# EAGLE board SparkFun_Simblee_Breakout_Panel_v11 (EAGLE 7.5.0), part 1 of 6
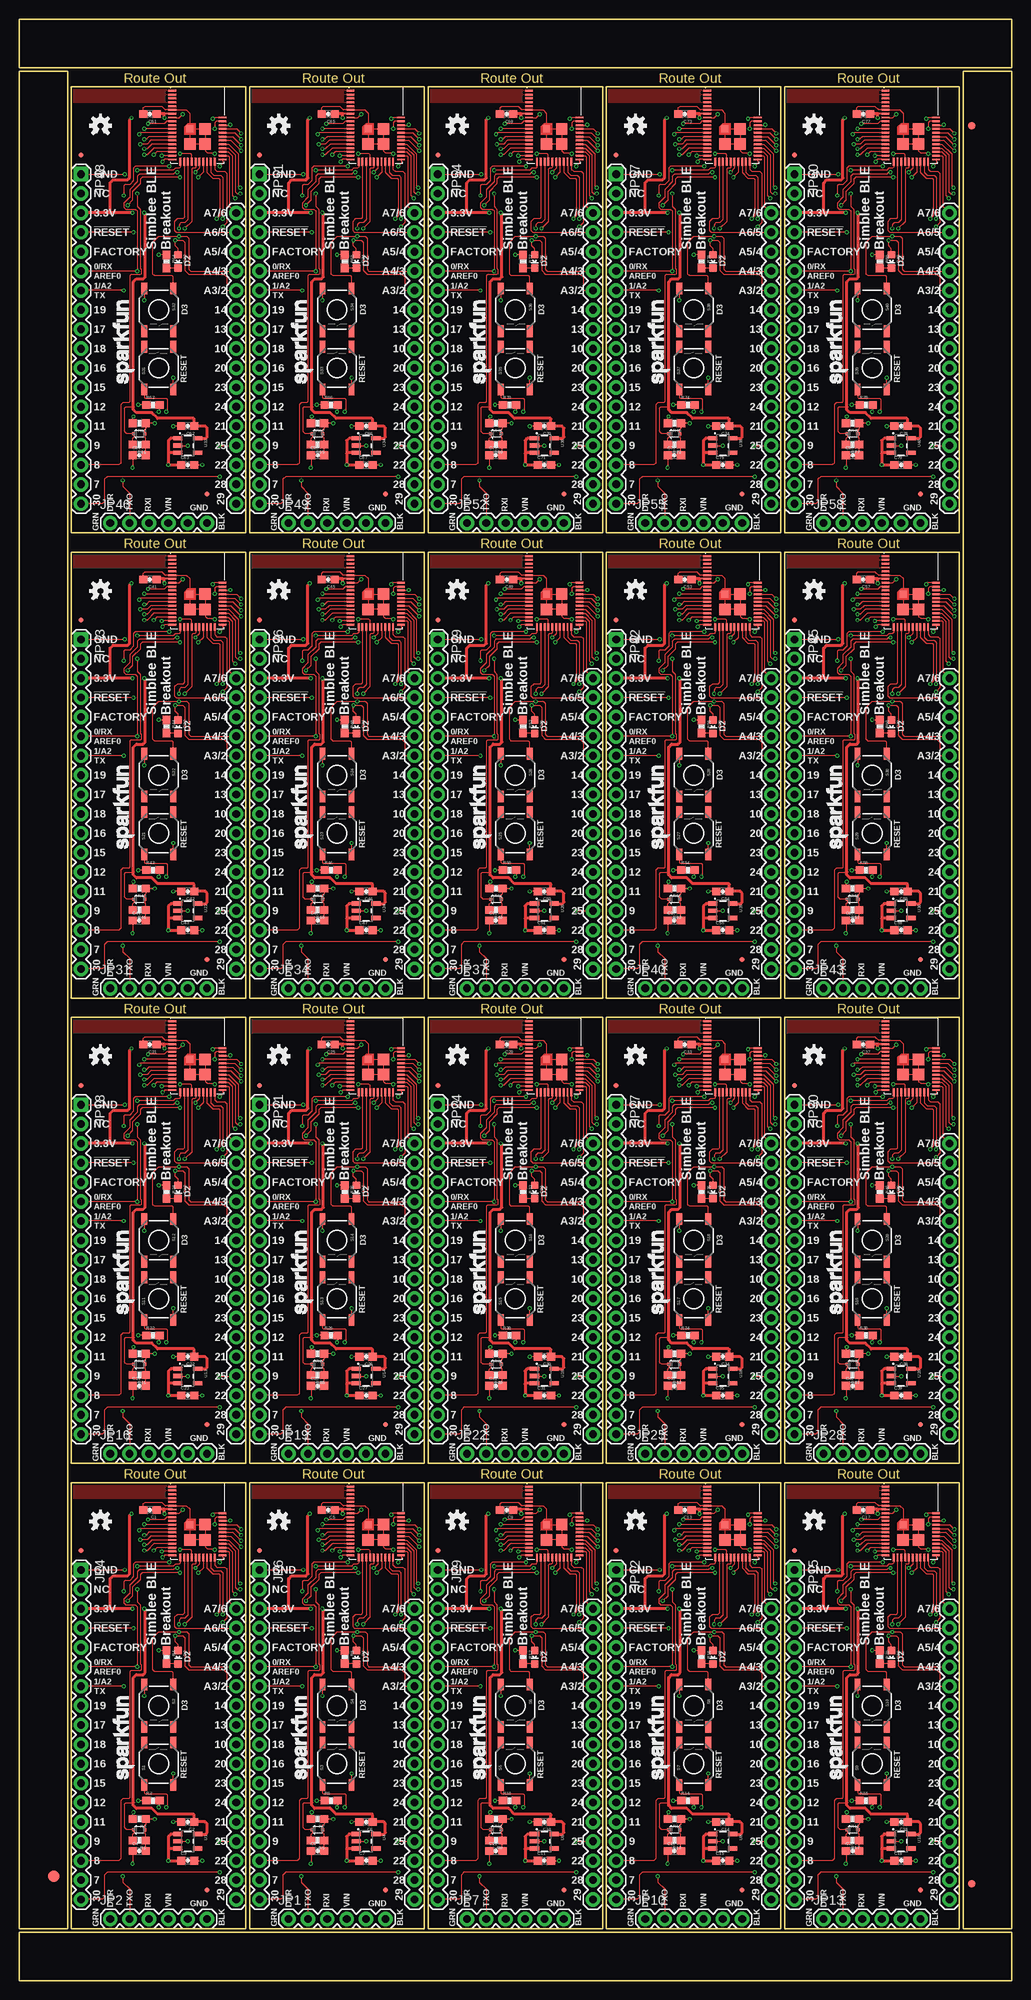
[diagram p0: board, top side]
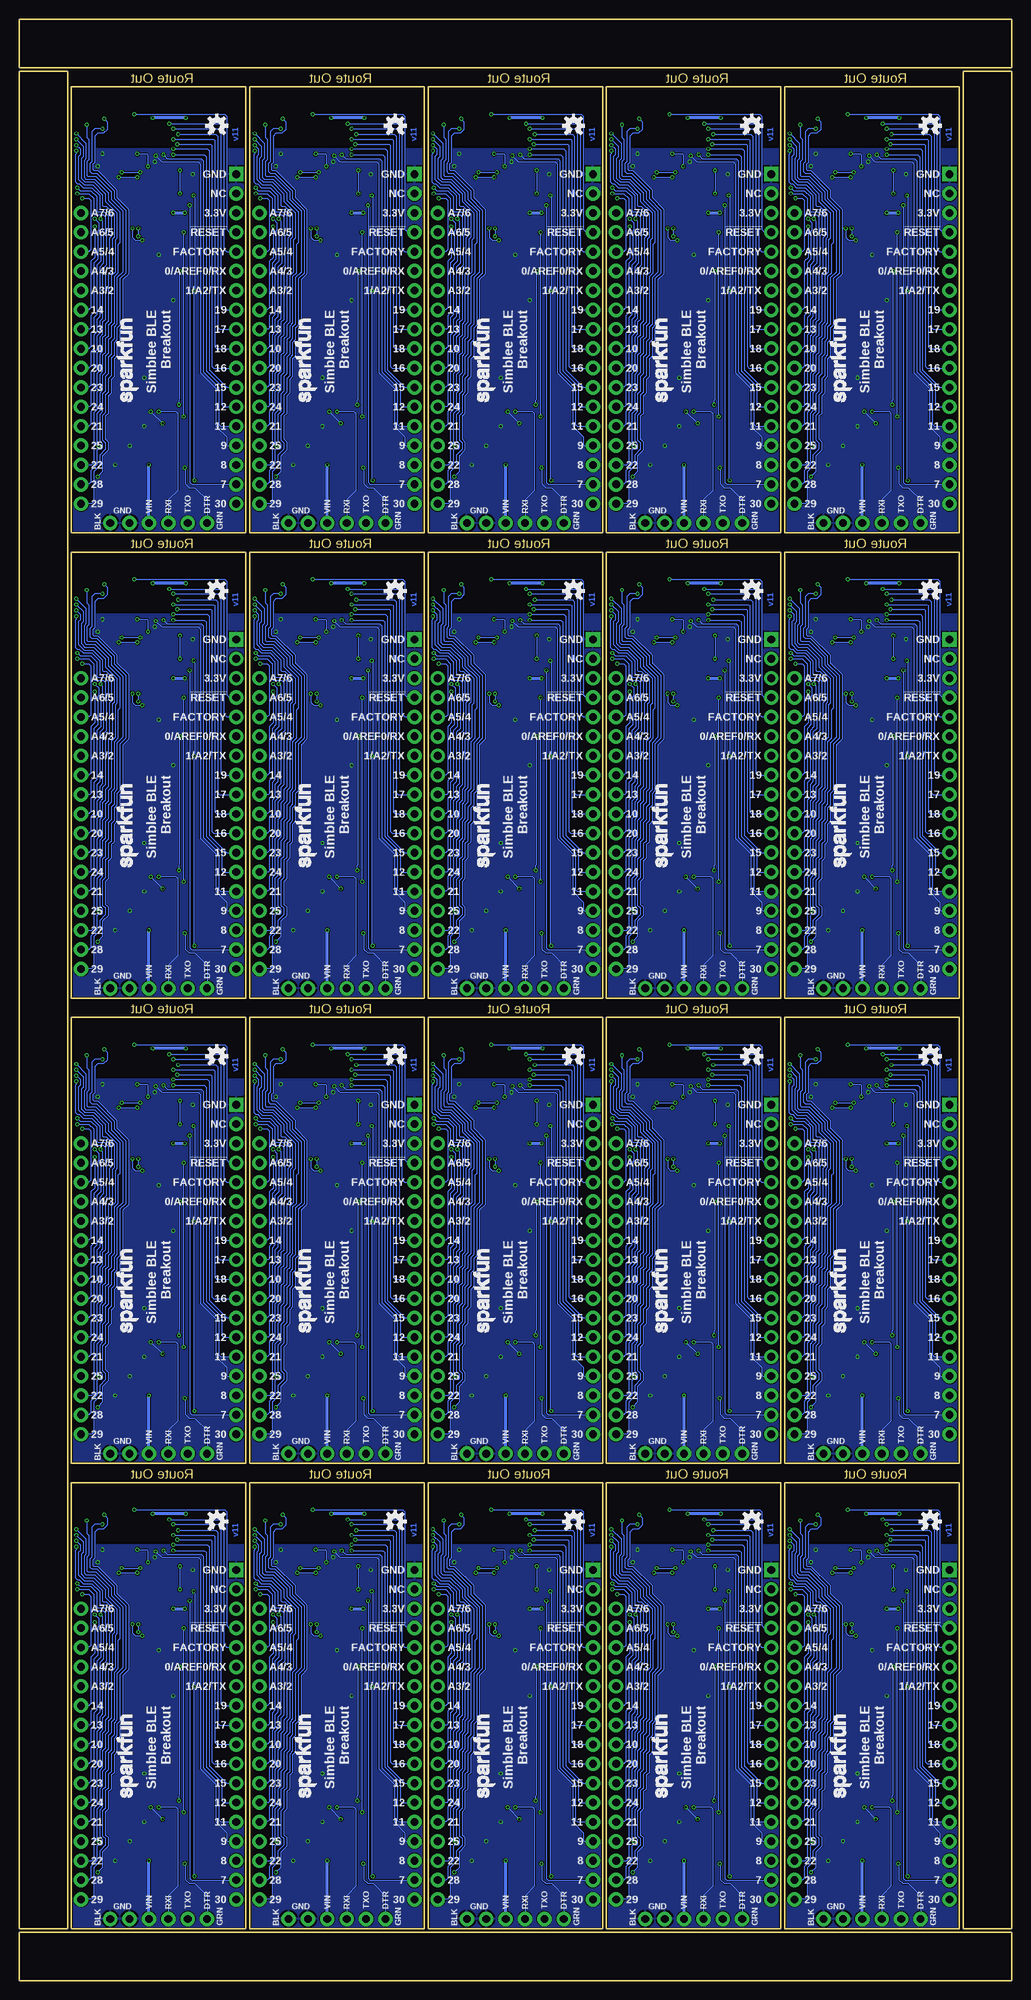
[diagram p1: board, bottom side, seen from below]

Size 130.05 x 257.05 mm. Coordinates in mm from the lower left corner, seen from the top.
Outline: 6.35,79.25 6.35,6.86 0,6.86 0,29.72
Outline: 0,27.18 0,250.19 6.35,250.19 6.35,76.71
Outline: 79.25,0 0,0 0,6.35 29.72,6.35
Outline: 27.18,6.35 130.05,6.35 130.05,0 76.71,0
Outline: 123.7,175.77 123.7,250.19 130.05,250.19 130.05,225.3
Outline: 130.05,227.84 130.05,6.86 123.7,6.86 123.7,178.31
Outline: 50.04,257.05 130.05,257.05 130.05,250.7 99.57,250.7
Outline: 102.11,250.7 0,250.7 0,257.05 52.58,257.05
Outline: 6.86,65.28 29.72,65.28 29.72,6.86 6.86,6.86 6.86,65.28
Outline: 30.23,65.28 53.09,65.28 53.09,6.86 30.23,6.86 30.23,65.28
Outline: 53.59,65.28 76.45,65.28 76.45,6.86 53.59,6.86 53.59,65.28
Outline: 76.96,65.28 99.82,65.28 99.82,6.86 76.96,6.86 76.96,65.28
Outline: 100.33,65.28 123.19,65.28 123.19,6.86 100.33,6.86 100.33,65.28
Outline: 6.86,126.24 29.72,126.24 29.72,67.82 6.86,67.82 6.86,126.24
Outline: 30.23,126.24 53.09,126.24 53.09,67.82 30.23,67.82 30.23,126.24
Outline: 53.59,126.24 76.45,126.24 76.45,67.82 53.59,67.82 53.59,126.24
Outline: 76.96,126.24 99.82,126.24 99.82,67.82 76.96,67.82 76.96,126.24
Outline: 100.33,126.24 123.19,126.24 123.19,67.82 100.33,67.82 100.33,126.24
Outline: 6.86,187.2 29.72,187.2 29.72,128.78 6.86,128.78 6.86,187.2
Outline: 30.23,187.2 53.09,187.2 53.09,128.78 30.23,128.78 30.23,187.2
Outline: 53.59,187.2 76.45,187.2 76.45,128.78 53.59,128.78 53.59,187.2
Outline: 76.96,187.2 99.82,187.2 99.82,128.78 76.96,128.78 76.96,187.2
Outline: 100.33,187.2 123.19,187.2 123.19,128.78 100.33,128.78 100.33,187.2
Outline: 6.86,248.16 29.72,248.16 29.72,189.74 6.86,189.74 6.86,248.16
Outline: 30.23,248.16 53.09,248.16 53.09,189.74 30.23,189.74 30.23,248.16
Outline: 53.59,248.16 76.45,248.16 76.45,189.74 53.59,189.74 53.59,248.16
Outline: 76.96,248.16 99.82,248.16 99.82,189.74 76.96,189.74 76.96,248.16
Outline: 100.33,248.16 123.19,248.16 123.19,189.74 100.33,189.74 100.33,248.16
Copper layers (1*16): Top 0.035mm / dielectric 1.5mm / Bottom 0.035mm
Design rules "SparkFun-2-layer-FAB-LIMIT": minimum track width 4mil, minimum drill 6mil, track to track 4mil, track to pad 4mil, pad to pad 4mil, via to via 4mil, smd to smd 4mil, copper to edge 4mil, drill to drill 4mil, minimum pad ring 5mil, minimum via ring 5mil, stop-mask expansion 4mil, vias tented up to drill 20mil, thermal gap 10mil
tRestrict: area 19.2,63.3 to 19.6,64.2; area 19.2,64.4 to 19.6,64.7; area 42.6,63.3 to 42.9,64.2; area 42.6,64.4 to 42.9,64.7; area 66,63.3 to 66.3,64.2; area 66,64.4 to 66.3,64.7; area 89.3,63.3 to 89.7,64.2; area 89.3,64.4 to 89.7,64.7; area 112.7,63.3 to 113,64.2; area 112.7,64.4 to 113,64.7; area 19.2,124.3 to 19.6,125.1; area 19.2,125.3 to 19.6,125.7; area 42.6,124.3 to 42.9,125.1; area 42.6,125.3 to 42.9,125.7; area 66,124.3 to 66.3,125.1; area 66,125.3 to 66.3,125.7; area 89.3,124.3 to 89.7,125.1; area 89.3,125.3 to 89.7,125.7; area 112.7,124.3 to 113,125.1; area 112.7,125.3 to 113,125.7; area 19.2,185.3 to 19.6,186.1; area 19.2,186.3 to 19.6,186.6; area 42.6,185.3 to 42.9,186.1; area 42.6,186.3 to 42.9,186.6; area 66,185.3 to 66.3,186.1; area 66,186.3 to 66.3,186.6; area 89.3,185.3 to 89.7,186.1; area 89.3,186.3 to 89.7,186.6; area 112.7,185.3 to 113,186.1; area 112.7,186.3 to 113,186.6; area 19.2,246.2 to 19.6,247.1; area 19.2,247.2 to 19.6,247.6; area 42.6,246.2 to 42.9,247.1; area 42.6,247.2 to 42.9,247.6; area 66,246.2 to 66.3,247.1; area 66,247.2 to 66.3,247.6; area 89.3,246.2 to 89.7,247.1; area 89.3,247.2 to 89.7,247.6; area 112.7,246.2 to 113,247.1; area 112.7,247.2 to 113,247.6

## Footprints (pad centres in the part's own frame; a part is rotated, then mirrored left to right if it is on the bottom)
0603-CAP = smd 1.1 x 1: 1 -0.85,0; 2 0.85,0
SOD-523 = smd 0.4 x 0.4: A -0.7,0; C 0.7,0
LED-0603 = smd 1 x 1: A 0,-0.877; C 0,0.877
FIDUCIAL-1.5X3 = smd 1.5 x 1.5: 1 0,0
FIDUCIAL-1X2 = smd 1 x 1: 1 0,0
MICRO-FIDUCIAL = smd 0.635 x 0.635: 1 0,0
1X06 = drill 1.016 pad 1.88: 1 0,0; 2 2.54,0; 3 5.08,0; 4 7.62,0; 5 10.16,0; 6 12.7,0
1X16 = drill 1.016 pad 1.88: 1 0,0; 2 2.54,0; 3 5.08,0; 4 7.62,0; 5 10.16,0; 6 12.7,0; 7 15.24,0; 8 17.78,0; 9 20.32,0; 10 22.86,0; 11 25.4,0; 12 27.94,0; 13 30.48,0; 14 33.02,0; 15 35.56,0; 16 38.1,0
1X18 = drill 1.016 pad 1.88 square: 1 0,0 | drill 1.016 pad 1.88: 2 2.54,0; 3 5.08,0; 4 7.62,0; 5 10.16,0; 6 12.7,0; 7 15.24,0; 8 17.78,0; 9 20.32,0; 10 22.86,0; 11 25.4,0; 12 27.94,0; 13 30.48,0; 14 33.02,0; 15 35.56,0; 16 38.1,0; 17 40.64,0; 18 43.18,0
0603-RES = smd 1.1 x 1: 1 -0.85,0; 2 0.85,0
TACTILE-SWITCH-SMD = smd 1.524 x 0.762: 1 -2.794,1.905; 2 2.794,1.905; 3 -2.794,-1.905; 4 2.794,-1.905
SOT23-5 = smd 0.55 x 1.2: 1 -0.95,-1.3; 2 0,-1.3; 3 0.95,-1.3; 4 0.95,1.3; 5 -0.95,1.3
RFD77101 = smd 1 x 0.254: 1 0,0; 2 0,-0.5; 3 0,-1; 4 0,-1.5; 5 0,-2; 6 0,-2.5; 7 0,-3; 8 0,-3.5; 9 0,-4; 10 0,-4.5; 11 0,-5; 12 0,-5.5; 13 0,-6; 14 0,-6.5; 15 0,-7; 16 0,-7.5; 17 0,-8; 18 0,-8.5; 19 0,-9; 30 6.61,-9; 31 6.61,-8.5; 32 6.61,-8; 33 6.61,-7.5; 34 6.61,-7; 35 6.61,-6.5; 36 6.61,-6; 37 6.61,-5.5; 38 6.61,-5; 39 6.61,-4.5; 40 6.61,-4; 41 6.61,-3.5 | smd 0.254 x 1: 20 1.055,-9.29; 21 1.555,-9.29; 22 2.055,-9.29; 23 2.555,-9.29; 24 3.055,-9.29; 25 3.555,-9.29; 26 4.055,-9.29; 27 4.555,-9.29; 28 5.055,-9.29; 29 5.555,-9.29 | smd 0.9 x 0.9: 42 2.3,-4.99 | smd 1.5 x 1.5: 43 2.3,-6.99; 44 4.3,-6.99; 45 4.3,-4.99

## Placement (x,y rotation side)
C1  0.1uF  [0603-CAP]  17.14,61.72 180 top
C2  1.0uF  [0603-CAP]  22.1,20.83 180 top
C3  1.0uF  [0603-CAP]  22.1,15.75 0 top
C4  10nF  [0603-CAP]  15.75,17.02 0 top
C5  0.1uF  [0603-CAP]  40.51,61.72 180 top
C6  1.0uF  [0603-CAP]  45.47,20.83 180 top
C7  1.0uF  [0603-CAP]  45.47,15.75 0 top
C8  10nF  [0603-CAP]  39.12,17.02 0 top
C9  0.1uF  [0603-CAP]  63.88,61.72 180 top
C10  1.0uF  [0603-CAP]  68.83,20.83 180 top
C11  1.0uF  [0603-CAP]  68.83,15.75 0 top
C12  10nF  [0603-CAP]  62.48,17.02 0 top
C13  0.1uF  [0603-CAP]  87.25,61.72 180 top
C14  1.0uF  [0603-CAP]  92.2,20.83 180 top
C15  1.0uF  [0603-CAP]  92.2,15.75 0 top
C16  10nF  [0603-CAP]  85.85,17.02 0 top
C17  0.1uF  [0603-CAP]  110.62,61.72 180 top
C18  1.0uF  [0603-CAP]  115.57,20.83 180 top
C19  1.0uF  [0603-CAP]  115.57,15.75 0 top
C20  10nF  [0603-CAP]  109.22,17.02 0 top
C21  0.1uF  [0603-CAP]  17.14,122.68 180 top
C22  1.0uF  [0603-CAP]  22.1,81.79 180 top
C23  1.0uF  [0603-CAP]  22.1,76.71 0 top
C24  10nF  [0603-CAP]  15.75,77.98 0 top
C25  0.1uF  [0603-CAP]  40.51,122.68 180 top
C26  1.0uF  [0603-CAP]  45.47,81.79 180 top
C27  1.0uF  [0603-CAP]  45.47,76.71 0 top
C28  10nF  [0603-CAP]  39.12,77.98 0 top
C29  0.1uF  [0603-CAP]  63.88,122.68 180 top
C30  1.0uF  [0603-CAP]  68.83,81.79 180 top
C31  1.0uF  [0603-CAP]  68.83,76.71 0 top
C32  10nF  [0603-CAP]  62.48,77.98 0 top
C33  0.1uF  [0603-CAP]  87.25,122.68 180 top
C34  1.0uF  [0603-CAP]  92.2,81.79 180 top
C35  1.0uF  [0603-CAP]  92.2,76.71 0 top
C36  10nF  [0603-CAP]  85.85,77.98 0 top
C37  0.1uF  [0603-CAP]  110.62,122.68 180 top
C38  1.0uF  [0603-CAP]  115.57,81.79 180 top
C39  1.0uF  [0603-CAP]  115.57,76.71 0 top
C40  10nF  [0603-CAP]  109.22,77.98 0 top
C41  0.1uF  [0603-CAP]  17.14,183.64 180 top
C42  1.0uF  [0603-CAP]  22.1,142.75 180 top
C43  1.0uF  [0603-CAP]  22.1,137.67 0 top
C44  10nF  [0603-CAP]  15.75,138.94 0 top
C45  0.1uF  [0603-CAP]  40.51,183.64 180 top
C46  1.0uF  [0603-CAP]  45.47,142.75 180 top
C47  1.0uF  [0603-CAP]  45.47,137.67 0 top
C48  10nF  [0603-CAP]  39.12,138.94 0 top
C49  0.1uF  [0603-CAP]  63.88,183.64 180 top
C50  1.0uF  [0603-CAP]  68.83,142.75 180 top
C51  1.0uF  [0603-CAP]  68.83,137.67 0 top
C52  10nF  [0603-CAP]  62.48,138.94 0 top
C53  0.1uF  [0603-CAP]  87.25,183.64 180 top
C54  1.0uF  [0603-CAP]  92.2,142.75 180 top
C55  1.0uF  [0603-CAP]  92.2,137.67 0 top
C56  10nF  [0603-CAP]  85.85,138.94 0 top
C57  0.1uF  [0603-CAP]  110.62,183.64 180 top
C58  1.0uF  [0603-CAP]  115.57,142.75 180 top
C59  1.0uF  [0603-CAP]  115.57,137.67 0 top
C60  10nF  [0603-CAP]  109.22,138.94 0 top
C61  0.1uF  [0603-CAP]  17.14,244.6 180 top
C62  1.0uF  [0603-CAP]  22.1,203.71 180 top
C63  1.0uF  [0603-CAP]  22.1,198.63 0 top
C64  10nF  [0603-CAP]  15.75,199.9 0 top
C65  0.1uF  [0603-CAP]  40.51,244.6 180 top
C66  1.0uF  [0603-CAP]  45.47,203.71 180 top
C67  1.0uF  [0603-CAP]  45.47,198.63 0 top
C68  10nF  [0603-CAP]  39.12,199.9 0 top
C69  0.1uF  [0603-CAP]  63.88,244.6 180 top
C70  1.0uF  [0603-CAP]  68.83,203.71 180 top
C71  1.0uF  [0603-CAP]  68.83,198.63 0 top
C72  10nF  [0603-CAP]  62.48,199.9 0 top
C73  0.1uF  [0603-CAP]  87.25,244.6 180 top
C74  1.0uF  [0603-CAP]  92.2,203.71 180 top
C75  1.0uF  [0603-CAP]  92.2,198.63 0 top
C76  10nF  [0603-CAP]  85.85,199.9 0 top
C77  0.1uF  [0603-CAP]  110.62,244.6 180 top
C78  1.0uF  [0603-CAP]  115.57,203.71 180 top
C79  1.0uF  [0603-CAP]  115.57,198.63 0 top
C80  10nF  [0603-CAP]  109.22,199.9 0 top
D1  RB751  [SOD-523]  15.75,19.81 180 top
D2  RED  [LED-0603]  20.83,42.42 180 top
D3  RB751  [SOD-523]  39.12,19.81 180 top
D4  RED  [LED-0603]  44.2,42.42 180 top
D5  RB751  [SOD-523]  62.48,19.81 180 top
D6  RED  [LED-0603]  67.56,42.42 180 top
D7  RB751  [SOD-523]  85.85,19.81 180 top
D8  RED  [LED-0603]  90.93,42.42 180 top
D9  RB751  [SOD-523]  109.22,19.81 180 top
D10  RED  [LED-0603]  114.3,42.42 180 top
D11  RB751  [SOD-523]  15.75,80.77 180 top
D12  RED  [LED-0603]  20.83,103.38 180 top
D13  RB751  [SOD-523]  39.12,80.77 180 top
D14  RED  [LED-0603]  44.2,103.38 180 top
D15  RB751  [SOD-523]  62.48,80.77 180 top
D16  RED  [LED-0603]  67.56,103.38 180 top
D17  RB751  [SOD-523]  85.85,80.77 180 top
D18  RED  [LED-0603]  90.93,103.38 180 top
D19  RB751  [SOD-523]  109.22,80.77 180 top
D20  RED  [LED-0603]  114.3,103.38 180 top
D21  RB751  [SOD-523]  15.75,141.73 180 top
D22  RED  [LED-0603]  20.83,164.34 180 top
D23  RB751  [SOD-523]  39.12,141.73 180 top
D24  RED  [LED-0603]  44.2,164.34 180 top
D25  RB751  [SOD-523]  62.48,141.73 180 top
D26  RED  [LED-0603]  67.56,164.34 180 top
D27  RB751  [SOD-523]  85.85,141.73 180 top
D28  RED  [LED-0603]  90.93,164.34 180 top
D29  RB751  [SOD-523]  109.22,141.73 180 top
D30  RED  [LED-0603]  114.3,164.34 180 top
D31  RB751  [SOD-523]  15.75,202.69 180 top
D32  RED  [LED-0603]  20.83,225.3 180 top
D33  RB751  [SOD-523]  39.12,202.69 180 top
D34  RED  [LED-0603]  44.2,225.3 180 top
D35  RB751  [SOD-523]  62.48,202.69 180 top
D36  RED  [LED-0603]  67.56,225.3 180 top
D37  RB751  [SOD-523]  85.85,202.69 180 top
D38  RED  [LED-0603]  90.93,225.3 180 top
D39  RB751  [SOD-523]  109.22,202.69 180 top
D40  RED  [LED-0603]  114.3,225.3 180 top
E$1  [FIDUCIAL-1.5X3]  4.57,13.72 0 top
E$5  [FIDUCIAL-1X2]  124.84,243.08 180 top
E$6  [FIDUCIAL-1X2]  124.84,12.7 0 top
FID1  FIDUCIALUFIDUCIAL  [MICRO-FIDUCIAL]  24.64,11.94 0 top
FID2  FIDUCIALUFIDUCIAL  [MICRO-FIDUCIAL]  8.13,56.39 0 top
FID3  FIDUCIALUFIDUCIAL  [MICRO-FIDUCIAL]  48.01,11.94 0 top
FID4  FIDUCIALUFIDUCIAL  [MICRO-FIDUCIAL]  31.5,56.39 0 top
FID5  FIDUCIALUFIDUCIAL  [MICRO-FIDUCIAL]  71.37,11.94 0 top
FID6  FIDUCIALUFIDUCIAL  [MICRO-FIDUCIAL]  54.86,56.39 0 top
FID7  FIDUCIALUFIDUCIAL  [MICRO-FIDUCIAL]  94.74,11.94 0 top
FID8  FIDUCIALUFIDUCIAL  [MICRO-FIDUCIAL]  78.23,56.39 0 top
FID9  FIDUCIALUFIDUCIAL  [MICRO-FIDUCIAL]  118.11,11.94 0 top
FID10  FIDUCIALUFIDUCIAL  [MICRO-FIDUCIAL]  101.6,56.39 0 top
FID11  FIDUCIALUFIDUCIAL  [MICRO-FIDUCIAL]  24.64,72.9 0 top
FID12  FIDUCIALUFIDUCIAL  [MICRO-FIDUCIAL]  8.13,117.35 0 top
FID13  FIDUCIALUFIDUCIAL  [MICRO-FIDUCIAL]  48.01,72.9 0 top
FID14  FIDUCIALUFIDUCIAL  [MICRO-FIDUCIAL]  31.5,117.35 0 top
FID15  FIDUCIALUFIDUCIAL  [MICRO-FIDUCIAL]  71.37,72.9 0 top
FID16  FIDUCIALUFIDUCIAL  [MICRO-FIDUCIAL]  54.86,117.35 0 top
FID17  FIDUCIALUFIDUCIAL  [MICRO-FIDUCIAL]  94.74,72.9 0 top
FID18  FIDUCIALUFIDUCIAL  [MICRO-FIDUCIAL]  78.23,117.35 0 top
FID19  FIDUCIALUFIDUCIAL  [MICRO-FIDUCIAL]  118.11,72.9 0 top
FID20  FIDUCIALUFIDUCIAL  [MICRO-FIDUCIAL]  101.6,117.35 0 top
FID21  FIDUCIALUFIDUCIAL  [MICRO-FIDUCIAL]  24.64,133.86 0 top
FID22  FIDUCIALUFIDUCIAL  [MICRO-FIDUCIAL]  8.13,178.31 0 top
FID23  FIDUCIALUFIDUCIAL  [MICRO-FIDUCIAL]  48.01,133.86 0 top
FID24  FIDUCIALUFIDUCIAL  [MICRO-FIDUCIAL]  31.5,178.31 0 top
FID25  FIDUCIALUFIDUCIAL  [MICRO-FIDUCIAL]  71.37,133.86 0 top
FID26  FIDUCIALUFIDUCIAL  [MICRO-FIDUCIAL]  54.86,178.31 0 top
FID27  FIDUCIALUFIDUCIAL  [MICRO-FIDUCIAL]  94.74,133.86 0 top
FID28  FIDUCIALUFIDUCIAL  [MICRO-FIDUCIAL]  78.23,178.31 0 top
FID29  FIDUCIALUFIDUCIAL  [MICRO-FIDUCIAL]  118.11,133.86 0 top
FID30  FIDUCIALUFIDUCIAL  [MICRO-FIDUCIAL]  101.6,178.31 0 top
FID31  FIDUCIALUFIDUCIAL  [MICRO-FIDUCIAL]  24.64,194.82 0 top
FID32  FIDUCIALUFIDUCIAL  [MICRO-FIDUCIAL]  8.13,239.27 0 top
FID33  FIDUCIALUFIDUCIAL  [MICRO-FIDUCIAL]  48.01,194.82 0 top
FID34  FIDUCIALUFIDUCIAL  [MICRO-FIDUCIAL]  31.5,239.27 0 top
FID35  FIDUCIALUFIDUCIAL  [MICRO-FIDUCIAL]  71.37,194.82 0 top
FID36  FIDUCIALUFIDUCIAL  [MICRO-FIDUCIAL]  54.86,239.27 0 top
FID37  FIDUCIALUFIDUCIAL  [MICRO-FIDUCIAL]  94.74,194.82 0 top
FID38  FIDUCIALUFIDUCIAL  [MICRO-FIDUCIAL]  78.23,239.27 0 top
FID39  FIDUCIALUFIDUCIAL  [MICRO-FIDUCIAL]  118.11,194.82 0 top
FID40  FIDUCIALUFIDUCIAL  [MICRO-FIDUCIAL]  101.6,239.27 0 top
JP1  [1X06]  35.31,8.13 0 top
JP2  [1X06]  11.94,8.13 0 top
JP3  [1X16]  28.45,48.77 270 top
JP4  [1X18]  8.13,53.85 270 top
JP5  [1X16]  51.82,48.77 270 top
JP6  [1X18]  31.5,53.85 270 top
JP7  [1X06]  58.67,8.13 0 top
JP8  [1X16]  75.18,48.77 270 top
JP9  [1X18]  54.86,53.85 270 top
JP10  [1X06]  82.04,8.13 0 top
JP11  [1X16]  98.55,48.77 270 top
JP12  [1X18]  78.23,53.85 270 top
JP13  [1X06]  105.41,8.13 0 top
JP14  [1X16]  121.92,48.77 270 top
JP15  [1X18]  101.6,53.85 270 top
JP16  [1X06]  11.94,69.09 0 top
JP17  [1X16]  28.45,109.73 270 top
JP18  [1X18]  8.13,114.81 270 top
JP19  [1X06]  35.31,69.09 0 top
JP20  [1X16]  51.82,109.73 270 top
JP21  [1X18]  31.5,114.81 270 top
JP22  [1X06]  58.67,69.09 0 top
JP23  [1X16]  75.18,109.73 270 top
JP24  [1X18]  54.86,114.81 270 top
JP25  [1X06]  82.04,69.09 0 top
JP26  [1X16]  98.55,109.73 270 top
JP27  [1X18]  78.23,114.81 270 top
JP28  [1X06]  105.41,69.09 0 top
JP29  [1X16]  121.92,109.73 270 top
JP30  [1X18]  101.6,114.81 270 top
JP31  [1X06]  11.94,130.05 0 top
JP32  [1X16]  28.45,170.69 270 top
JP33  [1X18]  8.13,175.77 270 top
JP34  [1X06]  35.31,130.05 0 top
JP35  [1X16]  51.82,170.69 270 top
JP36  [1X18]  31.5,175.77 270 top
JP37  [1X06]  58.67,130.05 0 top
JP38  [1X16]  75.18,170.69 270 top
JP39  [1X18]  54.86,175.77 270 top
JP40  [1X06]  82.04,130.05 0 top
JP41  [1X16]  98.55,170.69 270 top
JP42  [1X18]  78.23,175.77 270 top
JP43  [1X06]  105.41,130.05 0 top
JP44  [1X16]  121.92,170.69 270 top
JP45  [1X18]  101.6,175.77 270 top
JP46  [1X06]  11.94,191.01 0 top
JP47  [1X16]  28.45,231.65 270 top
JP48  [1X18]  8.13,236.73 270 top
JP49  [1X06]  35.31,191.01 0 top
JP50  [1X16]  51.82,231.65 270 top
JP51  [1X18]  31.5,236.73 270 top
JP52  [1X06]  58.67,191.01 0 top
JP53  [1X16]  75.18,231.65 270 top
JP54  [1X18]  54.86,236.73 270 top
JP55  [1X06]  82.04,191.01 0 top
JP56  [1X16]  98.55,231.65 270 top
JP57  [1X18]  78.23,236.73 270 top
JP58  [1X06]  105.41,191.01 0 top
JP59  [1X16]  121.92,231.65 270 top
JP60  [1X18]  101.6,236.73 270 top
LOGO1  SFE_LOGO_NAME.1_INCH  [SFE_LOGO_NAME_.1]  15.62,25.91 90 top
LOGO2  OSHW-LOGOS  [OSHW-LOGO-S]  10.67,60.2 0 top
LOGO3  SFE_LOGO_NAME.1_INCH  [SFE_LOGO_NAME_.1]  20.45,23.5 90 bottom
LOGO4  OSHW-LOGOS  [OSHW-LOGO-S]  10.67,60.2 0 bottom
LOGO5  SFE_LOGO_NAME.1_INCH  [SFE_LOGO_NAME_.1]  38.99,25.91 90 top
LOGO6  OSHW-LOGOS  [OSHW-LOGO-S]  34.04,60.2 0 top
LOGO7  SFE_LOGO_NAME.1_INCH  [SFE_LOGO_NAME_.1]  43.81,23.5 90 bottom
LOGO8  OSHW-LOGOS  [OSHW-LOGO-S]  34.04,60.2 0 bottom
LOGO9  SFE_LOGO_NAME.1_INCH  [SFE_LOGO_NAME_.1]  62.36,25.91 90 top
LOGO10  OSHW-LOGOS  [OSHW-LOGO-S]  57.4,60.2 0 top
LOGO11  SFE_LOGO_NAME.1_INCH  [SFE_LOGO_NAME_.1]  67.18,23.5 90 bottom
LOGO12  OSHW-LOGOS  [OSHW-LOGO-S]  57.4,60.2 0 bottom
LOGO13  SFE_LOGO_NAME.1_INCH  [SFE_LOGO_NAME_.1]  85.72,25.91 90 top
LOGO14  OSHW-LOGOS  [OSHW-LOGO-S]  80.77,60.2 0 top
LOGO15  SFE_LOGO_NAME.1_INCH  [SFE_LOGO_NAME_.1]  90.55,23.5 90 bottom
LOGO16  OSHW-LOGOS  [OSHW-LOGO-S]  80.77,60.2 0 bottom
LOGO17  SFE_LOGO_NAME.1_INCH  [SFE_LOGO_NAME_.1]  109.09,25.91 90 top
LOGO18  OSHW-LOGOS  [OSHW-LOGO-S]  104.14,60.2 0 top
LOGO19  SFE_LOGO_NAME.1_INCH  [SFE_LOGO_NAME_.1]  113.92,23.5 90 bottom
LOGO20  OSHW-LOGOS  [OSHW-LOGO-S]  104.14,60.2 0 bottom
LOGO21  SFE_LOGO_NAME.1_INCH  [SFE_LOGO_NAME_.1]  15.62,86.87 90 top
LOGO22  OSHW-LOGOS  [OSHW-LOGO-S]  10.67,121.16 0 top
LOGO23  SFE_LOGO_NAME.1_INCH  [SFE_LOGO_NAME_.1]  20.45,84.45 90 bottom
LOGO24  OSHW-LOGOS  [OSHW-LOGO-S]  10.67,121.16 0 bottom
LOGO25  SFE_LOGO_NAME.1_INCH  [SFE_LOGO_NAME_.1]  38.99,86.87 90 top
LOGO26  OSHW-LOGOS  [OSHW-LOGO-S]  34.04,121.16 0 top
LOGO27  SFE_LOGO_NAME.1_INCH  [SFE_LOGO_NAME_.1]  43.81,84.45 90 bottom
LOGO28  OSHW-LOGOS  [OSHW-LOGO-S]  34.04,121.16 0 bottom
LOGO29  SFE_LOGO_NAME.1_INCH  [SFE_LOGO_NAME_.1]  62.36,86.87 90 top
LOGO30  OSHW-LOGOS  [OSHW-LOGO-S]  57.4,121.16 0 top
LOGO31  SFE_LOGO_NAME.1_INCH  [SFE_LOGO_NAME_.1]  67.18,84.45 90 bottom
LOGO32  OSHW-LOGOS  [OSHW-LOGO-S]  57.4,121.16 0 bottom
LOGO33  SFE_LOGO_NAME.1_INCH  [SFE_LOGO_NAME_.1]  85.72,86.87 90 top
LOGO34  OSHW-LOGOS  [OSHW-LOGO-S]  80.77,121.16 0 top
LOGO35  SFE_LOGO_NAME.1_INCH  [SFE_LOGO_NAME_.1]  90.55,84.45 90 bottom
LOGO36  OSHW-LOGOS  [OSHW-LOGO-S]  80.77,121.16 0 bottom
LOGO37  SFE_LOGO_NAME.1_INCH  [SFE_LOGO_NAME_.1]  109.09,86.87 90 top
LOGO38  OSHW-LOGOS  [OSHW-LOGO-S]  104.14,121.16 0 top
LOGO39  SFE_LOGO_NAME.1_INCH  [SFE_LOGO_NAME_.1]  113.92,84.45 90 bottom
LOGO40  OSHW-LOGOS  [OSHW-LOGO-S]  104.14,121.16 0 bottom
LOGO41  SFE_LOGO_NAME.1_INCH  [SFE_LOGO_NAME_.1]  15.62,147.83 90 top
LOGO42  OSHW-LOGOS  [OSHW-LOGO-S]  10.67,182.12 0 top
LOGO43  SFE_LOGO_NAME.1_INCH  [SFE_LOGO_NAME_.1]  20.45,145.41 90 bottom
LOGO44  OSHW-LOGOS  [OSHW-LOGO-S]  10.67,182.12 0 bottom
LOGO45  SFE_LOGO_NAME.1_INCH  [SFE_LOGO_NAME_.1]  38.99,147.83 90 top
LOGO46  OSHW-LOGOS  [OSHW-LOGO-S]  34.04,182.12 0 top
LOGO47  SFE_LOGO_NAME.1_INCH  [SFE_LOGO_NAME_.1]  43.81,145.41 90 bottom
LOGO48  OSHW-LOGOS  [OSHW-LOGO-S]  34.04,182.12 0 bottom
LOGO49  SFE_LOGO_NAME.1_INCH  [SFE_LOGO_NAME_.1]  62.36,147.83 90 top
LOGO50  OSHW-LOGOS  [OSHW-LOGO-S]  57.4,182.12 0 top
LOGO51  SFE_LOGO_NAME.1_INCH  [SFE_LOGO_NAME_.1]  67.18,145.41 90 bottom
LOGO52  OSHW-LOGOS  [OSHW-LOGO-S]  57.4,182.12 0 bottom
LOGO53  SFE_LOGO_NAME.1_INCH  [SFE_LOGO_NAME_.1]  85.72,147.83 90 top
LOGO54  OSHW-LOGOS  [OSHW-LOGO-S]  80.77,182.12 0 top
LOGO55  SFE_LOGO_NAME.1_INCH  [SFE_LOGO_NAME_.1]  90.55,145.41 90 bottom
LOGO56  OSHW-LOGOS  [OSHW-LOGO-S]  80.77,182.12 0 bottom
LOGO57  SFE_LOGO_NAME.1_INCH  [SFE_LOGO_NAME_.1]  109.09,147.83 90 top
LOGO58  OSHW-LOGOS  [OSHW-LOGO-S]  104.14,182.12 0 top
LOGO59  SFE_LOGO_NAME.1_INCH  [SFE_LOGO_NAME_.1]  113.92,145.41 90 bottom
LOGO60  OSHW-LOGOS  [OSHW-LOGO-S]  104.14,182.12 0 bottom
LOGO61  SFE_LOGO_NAME.1_INCH  [SFE_LOGO_NAME_.1]  15.62,208.79 90 top
LOGO62  OSHW-LOGOS  [OSHW-LOGO-S]  10.67,243.08 0 top
LOGO63  SFE_LOGO_NAME.1_INCH  [SFE_LOGO_NAME_.1]  20.45,206.38 90 bottom
LOGO64  OSHW-LOGOS  [OSHW-LOGO-S]  10.67,243.08 0 bottom
LOGO65  SFE_LOGO_NAME.1_INCH  [SFE_LOGO_NAME_.1]  38.99,208.79 90 top
LOGO66  OSHW-LOGOS  [OSHW-LOGO-S]  34.04,243.08 0 top
LOGO67  SFE_LOGO_NAME.1_INCH  [SFE_LOGO_NAME_.1]  43.81,206.38 90 bottom
LOGO68  OSHW-LOGOS  [OSHW-LOGO-S]  34.04,243.08 0 bottom
LOGO69  SFE_LOGO_NAME.1_INCH  [SFE_LOGO_NAME_.1]  62.36,208.79 90 top
LOGO70  OSHW-LOGOS  [OSHW-LOGO-S]  57.4,243.08 0 top
LOGO71  SFE_LOGO_NAME.1_INCH  [SFE_LOGO_NAME_.1]  67.18,206.38 90 bottom
LOGO72  OSHW-LOGOS  [OSHW-LOGO-S]  57.4,243.08 0 bottom
LOGO73  SFE_LOGO_NAME.1_INCH  [SFE_LOGO_NAME_.1]  85.72,208.79 90 top
LOGO74  OSHW-LOGOS  [OSHW-LOGO-S]  80.77,243.08 0 top
LOGO75  SFE_LOGO_NAME.1_INCH  [SFE_LOGO_NAME_.1]  90.55,206.38 90 bottom
LOGO76  OSHW-LOGOS  [OSHW-LOGO-S]  80.77,243.08 0 bottom
LOGO77  SFE_LOGO_NAME.1_INCH  [SFE_LOGO_NAME_.1]  109.09,208.79 90 top
LOGO78  OSHW-LOGOS  [OSHW-LOGO-S]  104.14,243.08 0 top
LOGO79  SFE_LOGO_NAME.1_INCH  [SFE_LOGO_NAME_.1]  113.92,206.38 90 bottom
LOGO80  OSHW-LOGOS  [OSHW-LOGO-S]  104.14,243.08 0 bottom
R1  10K  [0603-RES]  15.75,18.41 180 top
R2  1K  [0603-RES]  17.53,23.62 0 top
R3  100  [0603-RES]  15.75,21.21 180 top
R4  1K  [0603-RES]  19.3,42.42 270 top
R5  10K  [0603-RES]  39.12,18.41 180 top
R6  1K  [0603-RES]  40.89,23.62 0 top
R7  100  [0603-RES]  39.12,21.21 180 top
R8  1K  [0603-RES]  42.67,42.42 270 top
R9  10K  [0603-RES]  62.48,18.41 180 top
R10  1K  [0603-RES]  64.26,23.62 0 top
R11  100  [0603-RES]  62.48,21.21 180 top
R12  1K  [0603-RES]  66.04,42.42 270 top
R13  10K  [0603-RES]  85.85,18.41 180 top
R14  1K  [0603-RES]  87.63,23.62 0 top
R15  100  [0603-RES]  85.85,21.21 180 top
R16  1K  [0603-RES]  89.41,42.42 270 top
R17  10K  [0603-RES]  109.22,18.41 180 top
R18  1K  [0603-RES]  111,23.62 0 top
R19  100  [0603-RES]  109.22,21.21 180 top
R20  1K  [0603-RES]  112.78,42.42 270 top
R21  10K  [0603-RES]  15.75,79.38 180 top
R22  1K  [0603-RES]  17.53,84.58 0 top
R23  100  [0603-RES]  15.75,82.17 180 top
R24  1K  [0603-RES]  19.3,103.38 270 top
R25  10K  [0603-RES]  39.12,79.38 180 top
R26  1K  [0603-RES]  40.89,84.58 0 top
R27  100  [0603-RES]  39.12,82.17 180 top
R28  1K  [0603-RES]  42.67,103.38 270 top
R29  10K  [0603-RES]  62.48,79.38 180 top
R30  1K  [0603-RES]  64.26,84.58 0 top
R31  100  [0603-RES]  62.48,82.17 180 top
R32  1K  [0603-RES]  66.04,103.38 270 top
R33  10K  [0603-RES]  85.85,79.38 180 top
R34  1K  [0603-RES]  87.63,84.58 0 top
R35  100  [0603-RES]  85.85,82.17 180 top
R36  1K  [0603-RES]  89.41,103.38 270 top
R37  10K  [0603-RES]  109.22,79.38 180 top
R38  1K  [0603-RES]  111,84.58 0 top
R39  100  [0603-RES]  109.22,82.17 180 top
R40  1K  [0603-RES]  112.78,103.38 270 top
R41  10K  [0603-RES]  15.75,140.34 180 top
R42  1K  [0603-RES]  17.53,145.54 0 top
R43  100  [0603-RES]  15.75,143.13 180 top
R44  1K  [0603-RES]  19.3,164.34 270 top
R45  10K  [0603-RES]  39.12,140.34 180 top
R46  1K  [0603-RES]  40.89,145.54 0 top
R47  100  [0603-RES]  39.12,143.13 180 top
R48  1K  [0603-RES]  42.67,164.34 270 top
R49  10K  [0603-RES]  62.48,140.34 180 top
R50  1K  [0603-RES]  64.26,145.54 0 top
R51  100  [0603-RES]  62.48,143.13 180 top
R52  1K  [0603-RES]  66.04,164.34 270 top
R53  10K  [0603-RES]  85.85,140.34 180 top
R54  1K  [0603-RES]  87.63,145.54 0 top
R55  100  [0603-RES]  85.85,143.13 180 top
R56  1K  [0603-RES]  89.41,164.34 270 top
R57  10K  [0603-RES]  109.22,140.34 180 top
R58  1K  [0603-RES]  111,145.54 0 top
R59  100  [0603-RES]  109.22,143.13 180 top
R60  1K  [0603-RES]  112.78,164.34 270 top
R61  10K  [0603-RES]  15.75,201.29 180 top
R62  1K  [0603-RES]  17.53,206.5 0 top
R63  100  [0603-RES]  15.75,204.09 180 top
R64  1K  [0603-RES]  19.3,225.3 270 top
R65  10K  [0603-RES]  39.12,201.29 180 top
R66  1K  [0603-RES]  40.89,206.5 0 top
R67  100  [0603-RES]  39.12,204.09 180 top
R68  1K  [0603-RES]  42.67,225.3 270 top
R69  10K  [0603-RES]  62.48,201.29 180 top
R70  1K  [0603-RES]  64.26,206.5 0 top
R71  100  [0603-RES]  62.48,204.09 180 top
R72  1K  [0603-RES]  66.04,225.3 270 top
R73  10K  [0603-RES]  85.85,201.29 180 top
R74  1K  [0603-RES]  87.63,206.5 0 top
R75  100  [0603-RES]  85.85,204.09 180 top
R76  1K  [0603-RES]  89.41,225.3 270 top
R77  10K  [0603-RES]  109.22,201.29 180 top
R78  1K  [0603-RES]  111,206.5 0 top
R79  100  [0603-RES]  109.22,204.09 180 top
R80  1K  [0603-RES]  112.78,225.3 270 top
S1  SWITCH-MOMENTARY-2SMD  [TACTILE-SWITCH-SMD]  18.29,28.45 90 top
S2  SWITCH-MOMENTARY-2SMD  [TACTILE-SWITCH-SMD]  18.29,36.07 270 top
S3  SWITCH-MOMENTARY-2SMD  [TACTILE-SWITCH-SMD]  41.66,28.45 90 top
S4  SWITCH-MOMENTARY-2SMD  [TACTILE-SWITCH-SMD]  41.66,36.07 270 top
S5  SWITCH-MOMENTARY-2SMD  [TACTILE-SWITCH-SMD]  65.02,28.45 90 top
S6  SWITCH-MOMENTARY-2SMD  [TACTILE-SWITCH-SMD]  65.02,36.07 270 top
S7  SWITCH-MOMENTARY-2SMD  [TACTILE-SWITCH-SMD]  88.39,28.45 90 top
S8  SWITCH-MOMENTARY-2SMD  [TACTILE-SWITCH-SMD]  88.39,36.07 270 top
S9  SWITCH-MOMENTARY-2SMD  [TACTILE-SWITCH-SMD]  111.76,28.45 90 top
S10  SWITCH-MOMENTARY-2SMD  [TACTILE-SWITCH-SMD]  111.76,36.07 270 top
S11  SWITCH-MOMENTARY-2SMD  [TACTILE-SWITCH-SMD]  18.29,89.41 90 top
S12  SWITCH-MOMENTARY-2SMD  [TACTILE-SWITCH-SMD]  18.29,97.03 270 top
S13  SWITCH-MOMENTARY-2SMD  [TACTILE-SWITCH-SMD]  41.66,89.41 90 top
S14  SWITCH-MOMENTARY-2SMD  [TACTILE-SWITCH-SMD]  41.66,97.03 270 top
S15  SWITCH-MOMENTARY-2SMD  [TACTILE-SWITCH-SMD]  65.02,89.41 90 top
S16  SWITCH-MOMENTARY-2SMD  [TACTILE-SWITCH-SMD]  65.02,97.03 270 top
S17  SWITCH-MOMENTARY-2SMD  [TACTILE-SWITCH-SMD]  88.39,89.41 90 top
S18  SWITCH-MOMENTARY-2SMD  [TACTILE-SWITCH-SMD]  88.39,97.03 270 top
S19  SWITCH-MOMENTARY-2SMD  [TACTILE-SWITCH-SMD]  111.76,89.41 90 top
S20  SWITCH-MOMENTARY-2SMD  [TACTILE-SWITCH-SMD]  111.76,97.03 270 top
S21  SWITCH-MOMENTARY-2SMD  [TACTILE-SWITCH-SMD]  18.29,150.37 90 top
S22  SWITCH-MOMENTARY-2SMD  [TACTILE-SWITCH-SMD]  18.29,157.99 270 top
S23  SWITCH-MOMENTARY-2SMD  [TACTILE-SWITCH-SMD]  41.66,150.37 90 top
S24  SWITCH-MOMENTARY-2SMD  [TACTILE-SWITCH-SMD]  41.66,157.99 270 top
S25  SWITCH-MOMENTARY-2SMD  [TACTILE-SWITCH-SMD]  65.02,150.37 90 top
S26  SWITCH-MOMENTARY-2SMD  [TACTILE-SWITCH-SMD]  65.02,157.99 270 top
S27  SWITCH-MOMENTARY-2SMD  [TACTILE-SWITCH-SMD]  88.39,150.37 90 top
S28  SWITCH-MOMENTARY-2SMD  [TACTILE-SWITCH-SMD]  88.39,157.99 270 top
S29  SWITCH-MOMENTARY-2SMD  [TACTILE-SWITCH-SMD]  111.76,150.37 90 top
S30  SWITCH-MOMENTARY-2SMD  [TACTILE-SWITCH-SMD]  111.76,157.99 270 top
S31  SWITCH-MOMENTARY-2SMD  [TACTILE-SWITCH-SMD]  18.29,211.33 90 top
S32  SWITCH-MOMENTARY-2SMD  [TACTILE-SWITCH-SMD]  18.29,218.95 270 top
S33  SWITCH-MOMENTARY-2SMD  [TACTILE-SWITCH-SMD]  41.66,211.33 90 top
S34  SWITCH-MOMENTARY-2SMD  [TACTILE-SWITCH-SMD]  41.66,218.95 270 top
S35  SWITCH-MOMENTARY-2SMD  [TACTILE-SWITCH-SMD]  65.02,211.33 90 top
S36  SWITCH-MOMENTARY-2SMD  [TACTILE-SWITCH-SMD]  65.02,218.95 270 top
S37  SWITCH-MOMENTARY-2SMD  [TACTILE-SWITCH-SMD]  88.39,211.33 90 top
S38  SWITCH-MOMENTARY-2SMD  [TACTILE-SWITCH-SMD]  88.39,218.95 270 top
S39  SWITCH-MOMENTARY-2SMD  [TACTILE-SWITCH-SMD]  111.76,211.33 90 top
S40  SWITCH-MOMENTARY-2SMD  [TACTILE-SWITCH-SMD]  111.76,218.95 270 top
U1  ADP160  [SOT23-5]  22.1,18.29 270 top
U2  RFD77101  [RFD77101]  20.07,64.77 0 top
U3  RFD77101  [RFD77101]  43.43,64.77 0 top
U4  ADP160  [SOT23-5]  45.47,18.29 270 top
U5  RFD77101  [RFD77101]  66.8,64.77 0 top
U6  ADP160  [SOT23-5]  68.83,18.29 270 top
U7  RFD77101  [RFD77101]  90.17,64.77 0 top
U8  ADP160  [SOT23-5]  92.2,18.29 270 top
U9  RFD77101  [RFD77101]  113.54,64.77 0 top
U10  ADP160  [SOT23-5]  115.57,18.29 270 top
U11  RFD77101  [RFD77101]  20.07,125.73 0 top
U12  ADP160  [SOT23-5]  22.1,79.25 270 top
U13  RFD77101  [RFD77101]  43.43,125.73 0 top
U14  ADP160  [SOT23-5]  45.47,79.25 270 top
U15  RFD77101  [RFD77101]  66.8,125.73 0 top
U16  ADP160  [SOT23-5]  68.83,79.25 270 top
U17  RFD77101  [RFD77101]  90.17,125.73 0 top
U18  ADP160  [SOT23-5]  92.2,79.25 270 top
U19  RFD77101  [RFD77101]  113.54,125.73 0 top
U20  ADP160  [SOT23-5]  115.57,79.25 270 top
U21  RFD77101  [RFD77101]  20.07,186.69 0 top
U22  ADP160  [SOT23-5]  22.1,140.21 270 top
U23  RFD77101  [RFD77101]  43.43,186.69 0 top
U24  ADP160  [SOT23-5]  45.47,140.21 270 top
U25  RFD77101  [RFD77101]  66.8,186.69 0 top
U26  ADP160  [SOT23-5]  68.83,140.21 270 top
U27  RFD77101  [RFD77101]  90.17,186.69 0 top
U28  ADP160  [SOT23-5]  92.2,140.21 270 top
U29  RFD77101  [RFD77101]  113.54,186.69 0 top
U30  ADP160  [SOT23-5]  115.57,140.21 270 top
U31  RFD77101  [RFD77101]  20.07,247.65 0 top
U32  ADP160  [SOT23-5]  22.1,201.17 270 top
U33  RFD77101  [RFD77101]  43.43,247.65 0 top
U34  ADP160  [SOT23-5]  45.47,201.17 270 top
U35  RFD77101  [RFD77101]  66.8,247.65 0 top
U36  ADP160  [SOT23-5]  68.83,201.17 270 top
U37  RFD77101  [RFD77101]  90.17,247.65 0 top
U38  ADP160  [SOT23-5]  92.2,201.17 270 top
U39  RFD77101  [RFD77101]  113.54,247.65 0 top
U40  ADP160  [SOT23-5]  115.57,201.17 270 top

## Library data of the parts
C1 C5 C9 C13 C17 C21 C25 C29 C33 C37 C41 C45 C49 C53 C57 C61 C65 C69 C73 C77 = SparkFun-Capacitors; PROD_ID: CAP-00810
C2 C3 C6 C7 C10 C11 C14 C15 C18 C19 C22 C23 C26 C27 C30 C31 C34 C35 C38 C39 C42 C43 C46 C47 C50 C51 C54 C55 C58 C59 C62 C63 C66 C67 C70 C71 C74 C75 C78 C79 = SparkFun-Capacitors; PROD_ID: CAP-00868
C4 C8 C12 C16 C20 C24 C28 C32 C36 C40 C44 C48 C52 C56 C60 C64 C68 C72 C76 C80 = SparkFun-Capacitors; PROD_ID: CAP-00867
D1 D3 D5 D7 D9 D11 D13 D15 D17 D19 D21 D23 D25 D27 D29 D31 D33 D35 D37 D39 = SparkFun-DiscreteSemi; PROD_ID: DIO-11018
D2 D4 D6 D8 D10 D12 D14 D16 D18 D20 D22 D24 D26 D28 D30 D32 D34 D36 D38 D40 = SparkFun-LED; PROD_ID: DIO-00819
E$1 = SparkFun-Retired
E$5 E$6 FID1-FID40 LOGO1-LOGO80 = SparkFun-Aesthetics
JP1-JP60 = SparkFun-Connectors
R1 R5 R9 R13 R17 R21 R25 R29 R33 R37 R41 R45 R49 R53 R57 R61 R65 R69 R73 R77 = SparkFun-Resistors; PROD_ID: RES-00824
R2 R4 R6 R8 R10 R12 R14 R16 R18 R20 R22 R24 R26 R28 R30 R32 R34 R36 R38 R40 R42 R44 R46 R48 R50 R52 R54 R56 R58 R60 R62 R64 R66 R68 R70 R72 R74 R76 R78 R80 = SparkFun-Resistors; PROD_ID: RES-07856
R3 R7 R11 R15 R19 R23 R27 R31 R35 R39 R43 R47 R51 R55 R59 R63 R67 R71 R75 R79 = SparkFun-Resistors; PROD_ID: RES-07863
S1-S40 = SparkFun-Electromechanical; PROD_ID: SWCH-08247
U1 U4 U6 U8 U10 U12 U14 U16 U18 U20 U22 U24 U26 U28 U30 U32 U34 U36 U38 U40 = SparkFun-PowerIC; PROD_ID: VREG-11306
U2 U3 U5 U7 U9 U11 U13 U15 U17 U19 U21 U23 U25 U27 U29 U31 U33 U35 U37 U39 = RFDigital; PROD_ID: COMP-13017

## Nets
3.3V: C1.1 C2.1 D1.C JP4.3 R1.2 U1.5 U2.7
3.3V1: C5.1 C6.1 D3.C JP6.3 R5.2 U3.7 U4.5
3.3V2: C9.1 C10.1 D5.C JP9.3 R9.2 U5.7 U6.5
3.3V3: C13.1 C14.1 D7.C JP12.3 R13.2 U7.7 U8.5
3.3V4: C17.1 C18.1 D9.C JP15.3 R17.2 U9.7 U10.5
3.3V5: C21.1 C22.1 D11.C JP18.3 R21.2 U11.7 U12.5
3.3V6: C25.1 C26.1 D13.C JP21.3 R25.2 U13.7 U14.5
3.3V7: C29.1 C30.1 D15.C JP24.3 R29.2 U15.7 U16.5
3.3V8: C33.1 C34.1 D17.C JP27.3 R33.2 U17.7 U18.5
3.3V9: C37.1 C38.1 D19.C JP30.3 R37.2 U19.7 U20.5
3.3V10: C41.1 C42.1 D21.C JP33.3 R41.2 U21.7 U22.5
3.3V11: C45.1 C46.1 D23.C JP36.3 R45.2 U23.7 U24.5
3.3V12: C49.1 C50.1 D25.C JP39.3 R49.2 U25.7 U26.5
3.3V13: C53.1 C54.1 D27.C JP42.3 R53.2 U27.7 U28.5
3.3V14: C57.1 C58.1 D29.C JP45.3 R57.2 U29.7 U30.5
3.3V15: C61.1 C62.1 D31.C JP48.3 R61.2 U31.7 U32.5
3.3V16: C65.1 C66.1 D33.C JP51.3 R65.2 U33.7 U34.5
3.3V17: C69.1 C70.1 D35.C JP54.3 R69.2 U35.7 U36.5
3.3V18: C73.1 C74.1 D37.C JP57.3 R73.2 U37.7 U38.5
3.3V19: C77.1 C78.1 D39.C JP60.3 R77.2 U39.7 U40.5
!RESET: JP4.4 R3.2 U2.8
!RESET1: JP6.4 R7.2 U3.8
!RESET2: JP9.4 R11.2 U5.8
!RESET3: JP12.4 R15.2 U7.8
!RESET4: JP15.4 R19.2 U9.8
!RESET5: JP18.4 R23.2 U11.8
!RESET6: JP21.4 R27.2 U13.8
!RESET7: JP24.4 R31.2 U15.8
!RESET8: JP27.4 R35.2 U17.8
!RESET9: JP30.4 R39.2 U19.8
!RESET10: JP33.4 R43.2 U21.8
!RESET11: JP36.4 R47.2 U23.8
!RESET12: JP39.4 R51.2 U25.8
!RESET13: JP42.4 R55.2 U27.8
!RESET14: JP45.4 R59.2 U29.8
!RESET15: JP48.4 R63.2 U31.8
!RESET16: JP51.4 R67.2 U33.8
!RESET17: JP54.4 R71.2 U35.8
!RESET18: JP57.4 R75.2 U37.8
!RESET19: JP60.4 R79.2 U39.8
DTR: C4.1 JP2.1
DTR1: C8.1 JP1.1
DTR2: C12.1 JP7.1
DTR3: C16.1 JP10.1
DTR4: C20.1 JP13.1
DTR5: C24.1 JP16.1
DTR6: C28.1 JP19.1
DTR7: C32.1 JP22.1
DTR8: C36.1 JP25.1
DTR9: C40.1 JP28.1
DTR10: C44.1 JP31.1
DTR11: C48.1 JP34.1
DTR12: C52.1 JP37.1
DTR13: C56.1 JP40.1
DTR14: C60.1 JP43.1
DTR15: C64.1 JP46.1
DTR16: C68.1 JP49.1
DTR17: C72.1 JP52.1
DTR18: C76.1 JP55.1
DTR19: C80.1 JP58.1
FACTORY: JP4.5 U2.9
FACTORY1: JP6.5 U3.9
FACTORY2: JP9.5 U5.9
FACTORY3: JP12.5 U7.9
FACTORY4: JP15.5 U9.9
FACTORY5: JP18.5 U11.9
FACTORY6: JP21.5 U13.9
FACTORY7: JP24.5 U15.9
FACTORY8: JP27.5 U17.9
FACTORY9: JP30.5 U19.9
FACTORY10: JP33.5 U21.9
FACTORY11: JP36.5 U23.9
FACTORY12: JP39.5 U25.9
FACTORY13: JP42.5 U27.9
FACTORY14: JP45.5 U29.9
FACTORY15: JP48.5 U31.9
FACTORY16: JP51.5 U33.9
FACTORY17: JP54.5 U35.9
FACTORY18: JP57.5 U37.9
FACTORY19: JP60.5 U39.9
GND: C1.2 C2.2 C3.2 JP2.5 JP2.6 JP4.1 R4.1 S1.3 S2.3 U1.2 U2.6 U2.19 U2.30 U2.42 U2.43 U2.44 U2.45
GND1: C5.2 C6.2 C7.2 JP1.5 JP1.6 JP6.1 R8.1 S3.3 S4.3 U3.6 U3.19 U3.30 U3.42 U3.43 U3.44 U3.45 U4.2
GND2: C9.2 C10.2 C11.2 JP7.5 JP7.6 JP9.1 R12.1 S5.3 S6.3 U5.6 U5.19 U5.30 U5.42 U5.43 U5.44 U5.45 U6.2
GND3: C13.2 C14.2 C15.2 JP10.5 JP10.6 JP12.1 R16.1 S7.3 S8.3 U7.6 U7.19 U7.30 U7.42 U7.43 U7.44 U7.45 U8.2
GND4: C17.2 C18.2 C19.2 JP13.5 JP13.6 JP15.1 R20.1 S9.3 S10.3 U9.6 U9.19 U9.30 U9.42 U9.43 U9.44 U9.45 U10.2
GND5: C21.2 C22.2 C23.2 JP16.5 JP16.6 JP18.1 R24.1 S11.3 S12.3 U11.6 U11.19 U11.30 U11.42 U11.43 U11.44 U11.45 U12.2
GND6: C25.2 C26.2 C27.2 JP19.5 JP19.6 JP21.1 R28.1 S13.3 S14.3 U13.6 U13.19 U13.30 U13.42 U13.43 U13.44 U13.45 U14.2
GND7: C29.2 C30.2 C31.2 JP22.5 JP22.6 JP24.1 R32.1 S15.3 S16.3 U15.6 U15.19 U15.30 U15.42 U15.43 U15.44 U15.45 U16.2
GND8: C33.2 C34.2 C35.2 JP25.5 JP25.6 JP27.1 R36.1 S17.3 S18.3 U17.6 U17.19 U17.30 U17.42 U17.43 U17.44 U17.45 U18.2
GND9: C37.2 C38.2 C39.2 JP28.5 JP28.6 JP30.1 R40.1 S19.3 S20.3 U19.6 U19.19 U19.30 U19.42 U19.43 U19.44 U19.45 U20.2
GND10: C41.2 C42.2 C43.2 JP31.5 JP31.6 JP33.1 R44.1 S21.3 S22.3 U21.6 U21.19 U21.30 U21.42 U21.43 U21.44 U21.45 U22.2
GND11: C45.2 C46.2 C47.2 JP34.5 JP34.6 JP36.1 R48.1 S23.3 S24.3 U23.6 U23.19 U23.30 U23.42 U23.43 U23.44 U23.45 U24.2
GND12: C49.2 C50.2 C51.2 JP37.5 JP37.6 JP39.1 R52.1 S25.3 S26.3 U25.6 U25.19 U25.30 U25.42 U25.43 U25.44 U25.45 U26.2
GND13: C53.2 C54.2 C55.2 JP40.5 JP40.6 JP42.1 R56.1 S27.3 S28.3 U27.6 U27.19 U27.30 U27.42 U27.43 U27.44 U27.45 U28.2
GND14: C57.2 C58.2 C59.2 JP43.5 JP43.6 JP45.1 R60.1 S29.3 S30.3 U29.6 U29.19 U29.30 U29.42 U29.43 U29.44 U29.45 U30.2
GND15: C61.2 C62.2 C63.2 JP46.5 JP46.6 JP48.1 R64.1 S31.3 S32.3 U31.6 U31.19 U31.30 U31.42 U31.43 U31.44 U31.45 U32.2
GND16: C65.2 C66.2 C67.2 JP49.5 JP49.6 JP51.1 R68.1 S33.3 S34.3 U33.6 U33.19 U33.30 U33.42 U33.43 U33.44 U33.45 U34.2
GND17: C69.2 C70.2 C71.2 JP52.5 JP52.6 JP54.1 R72.1 S35.3 S36.3 U35.6 U35.19 U35.30 U35.42 U35.43 U35.44 U35.45 U36.2
GND18: C73.2 C74.2 C75.2 JP55.5 JP55.6 JP57.1 R76.1 S37.3 S38.3 U37.6 U37.19 U37.30 U37.42 U37.43 U37.44 U37.45 U38.2
GND19: C77.2 C78.2 C79.2 JP58.5 JP58.6 JP60.1 R80.1 S39.3 S40.3 U39.6 U39.19 U39.30 U39.42 U39.43 U39.44 U39.45 U40.2
N$1: C4.2 D1.A R1.1 R3.1 S1.1
N$2: D2.C R4.2
N$3: C8.2 D3.A R5.1 R7.1 S3.1
N$4: D4.C R8.2
N$5: C12.2 D5.A R9.1 R11.1 S5.1
N$6: D6.C R12.2
N$7: C16.2 D7.A R13.1 R15.1 S7.1
N$8: D8.C R16.2
N$9: C20.2 D9.A R17.1 R19.1 S9.1
N$10: D10.C R20.2
N$11: C24.2 D11.A R21.1 R23.1 S11.1
N$12: D12.C R24.2
N$13: C28.2 D13.A R25.1 R27.1 S13.1
N$14: D14.C R28.2
N$15: C32.2 D15.A R29.1 R31.1 S15.1
N$16: D16.C R32.2
N$17: C36.2 D17.A R33.1 R35.1 S17.1
N$18: D18.C R36.2
N$19: C40.2 D19.A R37.1 R39.1 S19.1
N$20: D20.C R40.2
N$21: C44.2 D21.A R41.1 R43.1 S21.1
N$22: D22.C R44.2
N$23: C48.2 D23.A R45.1 R47.1 S23.1
N$24: D24.C R48.2
N$25: C52.2 D25.A R49.1 R51.1 S25.1
N$26: D26.C R52.2
N$27: C56.2 D27.A R53.1 R55.1 S27.1
N$28: D28.C R56.2
N$29: C60.2 D29.A R57.1 R59.1 S29.1
N$30: D30.C R60.2
N$31: C64.2 D31.A R61.1 R63.1 S31.1
N$32: D32.C R64.2
N$33: C68.2 D33.A R65.1 R67.1 S33.1
N$34: D34.C R68.2
N$35: C72.2 D35.A R69.1 R71.1 S35.1
N$36: D36.C R72.2
N$37: C76.2 D37.A R73.1 R75.1 S37.1
N$38: D38.C R76.2
N$39: C80.2 D39.A R77.1 R79.1 S39.1
N$40: D40.C R80.2
P0.01: JP5.6 U3.29
P0.02: JP5.7 U3.28
P0.02/AIN1: D4.A JP5.5 U3.24
P0.02/AIN2: D6.A JP8.5 U5.24
P0.02/AIN3: D2.A JP3.5 U2.24
P0.02/AIN4: D8.A JP11.5 U7.24
P0.02/AIN5: D10.A JP14.5 U9.24
P0.02/AIN6: D12.A JP17.5 U11.24
P0.02/AIN7: D14.A JP20.5 U13.24
P0.02/AIN8: D16.A JP23.5 U15.24
P0.02/AIN9: D18.A JP26.5 U17.24
P0.02/AIN10: D20.A JP29.5 U19.24
P0.02/AIN11: D22.A JP32.5 U21.24
P0.02/AIN12: D24.A JP35.5 U23.24
P0.02/AIN13: D26.A JP38.5 U25.24
P0.02/AIN14: D28.A JP41.5 U27.24
P0.02/AIN15: D30.A JP44.5 U29.24
P0.02/AIN16: D32.A JP47.5 U31.24
P0.02/AIN17: D34.A JP50.5 U33.24
P0.02/AIN18: D36.A JP53.5 U35.24
P0.02/AIN19: D38.A JP56.5 U37.24
P0.02/AIN20: D40.A JP59.5 U39.24
P0.03: JP5.8 U3.27
P0.03/AIN1: JP5.4 S4.1 U3.22
P0.03/AIN2: JP8.4 S6.1 U5.22
P0.03/AIN3: JP11.4 S8.1 U7.22
P0.03/AIN4: JP3.4 S2.1 U2.22
P0.03/AIN5: JP14.4 S10.1 U9.22
P0.03/AIN6: JP17.4 S12.1 U11.22
P0.03/AIN7: JP20.4 S14.1 U13.22
P0.03/AIN8: JP23.4 S16.1 U15.22
P0.03/AIN9: JP26.4 S18.1 U17.22
P0.03/AIN10: JP29.4 S20.1 U19.22
P0.03/AIN11: JP32.4 S22.1 U21.22
P0.03/AIN12: JP35.4 S24.1 U23.22
P0.03/AIN13: JP38.4 S26.1 U25.22
P0.03/AIN14: JP41.4 S28.1 U27.22
P0.03/AIN15: JP44.4 S30.1 U29.22
P0.03/AIN16: JP47.4 S32.1 U31.22
P0.03/AIN17: JP50.4 S34.1 U33.22
P0.03/AIN18: JP53.4 S36.1 U35.22
P0.03/AIN19: JP56.4 S38.1 U37.22
P0.03/AIN20: JP59.4 S40.1 U39.22
P0.04: JP6.17 U3.26
P0.04/AIN1: JP5.3 U3.32
P0.04/AIN2: JP8.3 U5.32
P0.04/AIN3: JP11.3 U7.32
P0.04/AIN4: JP14.3 U9.32
P0.04/AIN5: JP3.3 U2.32
P0.04/AIN6: JP17.3 U11.32
P0.04/AIN7: JP20.3 U13.32
P0.04/AIN8: JP23.3 U15.32
P0.04/AIN9: JP26.3 U17.32
P0.04/AIN10: JP29.3 U19.32
P0.04/AIN11: JP32.3 U21.32
P0.04/AIN12: JP35.3 U23.32
P0.04/AIN13: JP38.3 U25.32
P0.04/AIN14: JP41.3 U27.32
P0.04/AIN15: JP44.3 U29.32
P0.04/AIN16: JP47.3 U31.32
P0.04/AIN17: JP50.3 U33.32
P0.04/AIN18: JP53.3 U35.32
P0.04/AIN19: JP56.3 U37.32
P0.04/AIN20: JP59.3 U39.32
P0.05: JP6.16 U3.20
P0.05/AIN1: JP5.2 U3.21
P0.05/AIN2: JP8.2 U5.21
P0.05/AIN3: JP11.2 U7.21
P0.05/AIN4: JP14.2 U9.21
P0.05/AIN5: JP17.2 U11.21
P0.05/AIN6: JP3.2 U2.21
P0.05/AIN7: JP20.2 U13.21
P0.05/AIN8: JP23.2 U15.21
P0.05/AIN9: JP26.2 U17.21
P0.05/AIN10: JP29.2 U19.21
P0.05/AIN11: JP32.2 U21.21
P0.05/AIN12: JP35.2 U23.21
P0.05/AIN13: JP38.2 U25.21
P0.05/AIN14: JP41.2 U27.21
P0.05/AIN15: JP44.2 U29.21
P0.05/AIN16: JP47.2 U31.21
P0.05/AIN17: JP50.2 U33.21
P0.05/AIN18: JP53.2 U35.21
P0.05/AIN19: JP56.2 U37.21
P0.05/AIN20: JP59.2 U39.21
P0.06: JP6.18 U3.41
P0.06/AIN1: JP5.1 U3.31
P0.06/AIN2: JP8.1 U5.31
P0.06/AIN3: JP11.1 U7.31
P0.06/AIN4: JP14.1 U9.31
P0.06/AIN5: JP17.1 U11.31
P0.06/AIN6: JP20.1 U13.31
P0.06/AIN7: JP3.1 U2.31
P0.06/AIN8: JP23.1 U15.31
P0.06/AIN9: JP26.1 U17.31
P0.06/AIN10: JP29.1 U19.31
P0.06/AIN11: JP32.1 U21.31
P0.06/AIN12: JP35.1 U23.31
P0.06/AIN13: JP38.1 U25.31
P0.06/AIN14: JP41.1 U27.31
P0.06/AIN15: JP44.1 U29.31
P0.06/AIN16: JP47.1 U31.31
P0.06/AIN17: JP50.1 U33.31
P0.06/AIN18: JP53.1 U35.31
P0.06/AIN19: JP56.1 U37.31
P0.06/AIN20: JP59.1 U39.31
P0.07: JP4.17 U2.26
P0.08: JP4.16 U2.20
P0.09: JP4.15 U2.18
P0.10: JP3.8 U2.27
P0.11: JP4.14 U2.17
P0.12: JP4.13 U2.16
P0.13: JP3.7 U2.28
P0.14: JP3.6 U2.29
P0.15: JP4.12 U2.15
P0.16: JP4.11 U2.14
P0.17: JP4.9 U2.12
P0.18: JP4.10 U2.13
P0.19: JP4.8 U2.11
P0.20: JP3.9 U2.33
P0.21: JP3.12 U2.36
P0.22: JP3.14 U2.37
P0.23: JP3.10 U2.34
P0.24: JP3.11 U2.35
P0.25: JP3.13 U2.38
P0.26: JP5.16 U3.40
P0.27: JP5.15 U3.39
P0.28: JP3.15 U2.39
P0.29: JP3.16 U2.40
P0.30: JP4.18 U2.41
P0.31: JP5.13 U3.38
P0.32: JP5.14 U3.37
P0.33: JP5.12 U3.36
P0.34: JP5.11 U3.35
P0.35: JP5.10 U3.34
P0.36: JP5.9 U3.33
P0.37: JP6.15 U3.18
P0.38: JP6.14 U3.17
P0.39: JP6.13 U3.16
P0.40: JP6.12 U3.15
P0.41: JP6.11 U3.14
P0.42: JP6.10 U3.13
P0.43: JP6.9 U3.12
P0.44: JP6.8 U3.11
P0.45: JP8.6 U5.29
P0.46: JP8.7 U5.28
P0.47: JP8.8 U5.27
P0.48: JP9.17 U5.26
P0.49: JP9.16 U5.20
P0.50: JP9.18 U5.41
P0.51: JP8.16 U5.40
P0.52: JP8.15 U5.39
P0.53: JP8.13 U5.38
P0.54: JP8.14 U5.37
P0.55: JP8.12 U5.36
P0.56: JP8.11 U5.35
P0.57: JP8.10 U5.34
P0.58: JP8.9 U5.33
P0.59: JP9.15 U5.18
P0.60: JP9.14 U5.17
P0.61: JP9.13 U5.16
P0.62: JP9.12 U5.15
P0.63: JP9.11 U5.14
P0.64: JP9.10 U5.13
P0.65: JP9.9 U5.12
P0.66: JP9.8 U5.11
P0.67: JP11.6 U7.29
P0.68: JP11.7 U7.28
P0.69: JP11.8 U7.27
P0.70: JP12.17 U7.26
P0.71: JP12.16 U7.20
P0.72: JP12.18 U7.41
P0.73: JP11.16 U7.40
P0.74: JP11.15 U7.39
P0.75: JP11.13 U7.38
P0.76: JP11.14 U7.37
P0.77: JP11.12 U7.36
P0.78: JP11.11 U7.35
P0.79: JP11.10 U7.34
P0.80: JP11.9 U7.33
P0.81: JP12.15 U7.18
P0.82: JP12.14 U7.17
P0.83: JP12.13 U7.16
P0.84: JP12.12 U7.15
P0.85: JP12.11 U7.14
P0.86: JP12.10 U7.13
P0.87: JP12.9 U7.12
P0.88: JP12.8 U7.11
P0.89: JP14.6 U9.29
P0.90: JP14.7 U9.28
P0.91: JP14.8 U9.27
P0.92: JP15.17 U9.26
P0.93: JP15.16 U9.20
P0.94: JP15.18 U9.41
P0.95: JP14.16 U9.40
P0.96: JP14.15 U9.39
P0.97: JP14.13 U9.38
P0.98: JP14.14 U9.37
P0.99: JP14.12 U9.36
P0.100: JP14.11 U9.35
P0.101: JP14.10 U9.34
P0.102: JP14.9 U9.33
P0.103: JP15.15 U9.18
P0.104: JP15.14 U9.17
P0.105: JP15.13 U9.16
P0.106: JP15.12 U9.15
P0.107: JP15.11 U9.14
P0.108: JP15.10 U9.13
P0.109: JP15.9 U9.12
P0.110: JP15.8 U9.11
P0.111: JP17.6 U11.29
P0.112: JP17.7 U11.28
P0.113: JP17.8 U11.27
P0.114: JP18.17 U11.26
P0.115: JP18.16 U11.20
P0.116: JP18.18 U11.41
P0.117: JP17.16 U11.40
P0.118: JP17.15 U11.39
P0.119: JP17.13 U11.38
P0.120: JP17.14 U11.37
P0.121: JP17.12 U11.36
P0.122: JP17.11 U11.35
P0.123: JP17.10 U11.34
P0.124: JP17.9 U11.33
P0.125: JP18.15 U11.18
P0.126: JP18.14 U11.17
P0.127: JP18.13 U11.16
P0.128: JP18.12 U11.15
P0.129: JP18.11 U11.14
P0.130: JP18.10 U11.13
P0.131: JP18.9 U11.12
P0.132: JP18.8 U11.11
P0.133: JP20.6 U13.29
P0.134: JP20.7 U13.28
P0.135: JP20.8 U13.27
P0.136: JP21.17 U13.26
P0.137: JP21.16 U13.20
P0.138: JP21.18 U13.41
P0.139: JP20.16 U13.40
P0.140: JP20.15 U13.39
P0.141: JP20.13 U13.38
P0.142: JP20.14 U13.37
P0.143: JP20.12 U13.36
P0.144: JP20.11 U13.35
P0.145: JP20.10 U13.34
P0.146: JP20.9 U13.33
P0.147: JP21.15 U13.18
P0.148: JP21.14 U13.17
P0.149: JP21.13 U13.16
P0.150: JP21.12 U13.15
P0.151: JP21.11 U13.14
P0.152: JP21.10 U13.13
P0.153: JP21.9 U13.12
P0.154: JP21.8 U13.11
P0.155: JP23.6 U15.29
P0.156: JP23.7 U15.28
P0.157: JP23.8 U15.27
P0.158: JP24.17 U15.26
P0.159: JP24.16 U15.20
P0.160: JP24.18 U15.41
P0.161: JP23.16 U15.40
P0.162: JP23.15 U15.39
P0.163: JP23.13 U15.38
P0.164: JP23.14 U15.37
P0.165: JP23.12 U15.36
P0.166: JP23.11 U15.35
P0.167: JP23.10 U15.34
P0.168: JP23.9 U15.33
P0.169: JP24.15 U15.18
P0.170: JP24.14 U15.17
P0.171: JP24.13 U15.16
P0.172: JP24.12 U15.15
P0.173: JP24.11 U15.14
P0.174: JP24.10 U15.13
P0.175: JP24.9 U15.12
P0.176: JP24.8 U15.11
P0.177: JP26.6 U17.29
P0.178: JP26.7 U17.28
P0.179: JP26.8 U17.27
P0.180: JP27.17 U17.26
P0.181: JP27.16 U17.20
P0.182: JP27.18 U17.41
P0.183: JP26.16 U17.40
P0.184: JP26.15 U17.39
P0.185: JP26.13 U17.38
P0.186: JP26.14 U17.37
P0.187: JP26.12 U17.36
P0.188: JP26.11 U17.35
P0.189: JP26.10 U17.34
P0.190: JP26.9 U17.33
P0.191: JP27.15 U17.18
P0.192: JP27.14 U17.17
P0.193: JP27.13 U17.16
P0.194: JP27.12 U17.15
P0.195: JP27.11 U17.14
P0.196: JP27.10 U17.13
P0.197: JP27.9 U17.12
P0.198: JP27.8 U17.11
P0.199: JP29.6 U19.29
P0.200: JP29.7 U19.28
P0.201: JP29.8 U19.27
P0.202: JP30.17 U19.26
P0.203: JP30.16 U19.20
P0.204: JP30.18 U19.41
P0.205: JP29.16 U19.40
P0.206: JP29.15 U19.39
P0.207: JP29.13 U19.38
P0.208: JP29.14 U19.37
P0.209: JP29.12 U19.36
P0.210: JP29.11 U19.35
P0.211: JP29.10 U19.34
P0.212: JP29.9 U19.33
P0.213: JP30.15 U19.18
P0.214: JP30.14 U19.17
P0.215: JP30.13 U19.16
P0.216: JP30.12 U19.15
P0.217: JP30.11 U19.14
P0.218: JP30.10 U19.13
P0.219: JP30.9 U19.12
P0.220: JP30.8 U19.11
P0.221: JP32.6 U21.29
P0.222: JP32.7 U21.28
P0.223: JP32.8 U21.27
P0.224: JP33.17 U21.26
P0.225: JP33.16 U21.20
P0.226: JP33.18 U21.41
P0.227: JP32.16 U21.40
P0.228: JP32.15 U21.39
P0.229: JP32.13 U21.38
P0.230: JP32.14 U21.37
P0.231: JP32.12 U21.36
P0.232: JP32.11 U21.35
P0.233: JP32.10 U21.34
P0.234: JP32.9 U21.33
P0.235: JP33.15 U21.18
P0.236: JP33.14 U21.17
P0.237: JP33.13 U21.16
P0.238: JP33.12 U21.15
P0.239: JP33.11 U21.14
P0.240: JP33.10 U21.13
P0.241: JP33.9 U21.12
P0.242: JP33.8 U21.11
P0.243: JP35.6 U23.29
P0.244: JP35.7 U23.28
P0.245: JP35.8 U23.27
P0.246: JP36.17 U23.26
P0.247: JP36.16 U23.20
P0.248: JP36.18 U23.41
P0.249: JP35.16 U23.40
P0.250: JP35.15 U23.39
P0.251: JP35.13 U23.38
P0.252: JP35.14 U23.37
P0.253: JP35.12 U23.36
P0.254: JP35.11 U23.35
P0.255: JP35.10 U23.34
P0.256: JP35.9 U23.33
P0.257: JP36.15 U23.18
P0.258: JP36.14 U23.17
P0.259: JP36.13 U23.16
P0.260: JP36.12 U23.15
P0.261: JP36.11 U23.14
P0.262: JP36.10 U23.13
P0.263: JP36.9 U23.12
P0.264: JP36.8 U23.11
P0.265: JP38.6 U25.29
P0.266: JP38.7 U25.28
P0.267: JP38.8 U25.27
P0.268: JP39.17 U25.26
P0.269: JP39.16 U25.20
P0.270: JP39.18 U25.41
P0.271: JP38.16 U25.40
P0.272: JP38.15 U25.39
P0.273: JP38.13 U25.38
P0.274: JP38.14 U25.37
P0.275: JP38.12 U25.36
P0.276: JP38.11 U25.35
P0.277: JP38.10 U25.34
P0.278: JP38.9 U25.33
P0.279: JP39.15 U25.18
P0.280: JP39.14 U25.17
P0.281: JP39.13 U25.16
P0.282: JP39.12 U25.15
P0.283: JP39.11 U25.14
P0.284: JP39.10 U25.13
P0.285: JP39.9 U25.12
P0.286: JP39.8 U25.11
P0.287: JP41.6 U27.29
P0.288: JP41.7 U27.28
P0.289: JP41.8 U27.27
P0.290: JP42.17 U27.26
P0.291: JP42.16 U27.20
P0.292: JP42.18 U27.41
P0.293: JP41.16 U27.40
P0.294: JP41.15 U27.39
P0.295: JP41.13 U27.38
P0.296: JP41.14 U27.37
P0.297: JP41.12 U27.36
P0.298: JP41.11 U27.35
P0.299: JP41.10 U27.34
P0.300: JP41.9 U27.33
P0.301: JP42.15 U27.18
P0.302: JP42.14 U27.17
P0.303: JP42.13 U27.16
P0.304: JP42.12 U27.15
P0.305: JP42.11 U27.14
P0.306: JP42.10 U27.13
P0.307: JP42.9 U27.12
P0.308: JP42.8 U27.11
P0.309: JP44.6 U29.29
P0.310: JP44.7 U29.28
P0.311: JP44.8 U29.27
P0.312: JP45.17 U29.26
P0.313: JP45.16 U29.20
P0.314: JP45.18 U29.41
P0.315: JP44.16 U29.40
P0.316: JP44.15 U29.39
P0.317: JP44.13 U29.38
P0.318: JP44.14 U29.37
P0.319: JP44.12 U29.36
P0.320: JP44.11 U29.35
P0.321: JP44.10 U29.34
P0.322: JP44.9 U29.33
P0.323: JP45.15 U29.18
P0.324: JP45.14 U29.17
P0.325: JP45.13 U29.16
P0.326: JP45.12 U29.15
P0.327: JP45.11 U29.14
P0.328: JP45.10 U29.13
P0.329: JP45.9 U29.12
P0.330: JP45.8 U29.11
P0.331: JP47.6 U31.29
P0.332: JP47.7 U31.28
P0.333: JP47.8 U31.27
P0.334: JP48.17 U31.26
P0.335: JP48.16 U31.20
P0.336: JP48.18 U31.41
P0.337: JP47.16 U31.40
P0.338: JP47.15 U31.39
P0.339: JP47.13 U31.38
P0.340: JP47.14 U31.37
P0.341: JP47.12 U31.36
P0.342: JP47.11 U31.35
P0.343: JP47.10 U31.34
P0.344: JP47.9 U31.33
P0.345: JP48.15 U31.18
P0.346: JP48.14 U31.17
P0.347: JP48.13 U31.16
P0.348: JP48.12 U31.15
P0.349: JP48.11 U31.14
P0.350: JP48.10 U31.13
P0.351: JP48.9 U31.12
P0.352: JP48.8 U31.11
P0.353: JP50.6 U33.29
P0.354: JP50.7 U33.28
P0.355: JP50.8 U33.27
P0.356: JP51.17 U33.26
P0.357: JP51.16 U33.20
P0.358: JP51.18 U33.41
P0.359: JP50.16 U33.40
P0.360: JP50.15 U33.39
P0.361: JP50.13 U33.38
P0.362: JP50.14 U33.37
P0.363: JP50.12 U33.36
P0.364: JP50.11 U33.35
P0.365: JP50.10 U33.34
P0.366: JP50.9 U33.33
P0.367: JP51.15 U33.18
P0.368: JP51.14 U33.17
P0.369: JP51.13 U33.16
P0.370: JP51.12 U33.15
P0.371: JP51.11 U33.14
P0.372: JP51.10 U33.13
P0.373: JP51.9 U33.12
P0.374: JP51.8 U33.11
P0.375: JP53.6 U35.29
P0.376: JP53.7 U35.28
P0.377: JP53.8 U35.27
P0.378: JP54.17 U35.26
P0.379: JP54.16 U35.20
P0.380: JP54.18 U35.41
P0.381: JP53.16 U35.40
P0.382: JP53.15 U35.39
P0.383: JP53.13 U35.38
P0.384: JP53.14 U35.37
P0.385: JP53.12 U35.36
P0.386: JP53.11 U35.35
P0.387: JP53.10 U35.34
P0.388: JP53.9 U35.33
P0.389: JP54.15 U35.18
P0.390: JP54.14 U35.17
P0.391: JP54.13 U35.16
P0.392: JP54.12 U35.15
P0.393: JP54.11 U35.14
P0.394: JP54.10 U35.13
P0.395: JP54.9 U35.12
P0.396: JP54.8 U35.11
P0.397: JP56.6 U37.29
P0.398: JP56.7 U37.28
P0.399: JP56.8 U37.27
P0.400: JP57.17 U37.26
P0.401: JP57.16 U37.20
P0.402: JP57.18 U37.41
P0.403: JP56.16 U37.40
P0.404: JP56.15 U37.39
P0.405: JP56.13 U37.38
P0.406: JP56.14 U37.37
P0.407: JP56.12 U37.36
P0.408: JP56.11 U37.35
P0.409: JP56.10 U37.34
P0.410: JP56.9 U37.33
P0.411: JP57.15 U37.18
P0.412: JP57.14 U37.17
P0.413: JP57.13 U37.16
P0.414: JP57.12 U37.15
P0.415: JP57.11 U37.14
P0.416: JP57.10 U37.13
P0.417: JP57.9 U37.12
P0.418: JP57.8 U37.11
P0.419: JP59.6 U39.29
P0.420: JP59.7 U39.28
P0.421: JP59.8 U39.27
P0.422: JP60.17 U39.26
P0.423: JP60.16 U39.20
P0.424: JP60.18 U39.41
P0.425: JP59.16 U39.40
P0.426: JP59.15 U39.39
P0.427: JP59.13 U39.38
P0.428: JP59.14 U39.37
P0.429: JP59.12 U39.36
P0.430: JP59.11 U39.35
P0.431: JP59.10 U39.34
P0.432: JP59.9 U39.33
P0.433: JP60.15 U39.18
P0.434: JP60.14 U39.17
P0.435: JP60.13 U39.16
P0.436: JP60.12 U39.15
P0.437: JP60.11 U39.14
P0.438: JP60.10 U39.13
P0.439: JP60.9 U39.12
P0.440: JP60.8 U39.11
RXI: JP2.3 R2.2
RXI1: JP1.3 R6.2
RXI2: JP7.3 R10.2
RXI3: JP10.3 R14.2
RXI4: JP13.3 R18.2
RXI5: JP16.3 R22.2
RXI6: JP19.3 R26.2
RXI7: JP22.3 R30.2
RXI8: JP25.3 R34.2
RXI9: JP28.3 R38.2
RXI10: JP31.3 R42.2
RXI11: JP34.3 R46.2
RXI12: JP37.3 R50.2
RXI13: JP40.3 R54.2
RXI14: JP43.3 R58.2
RXI15: JP46.3 R62.2
RXI16: JP49.3 R66.2
RXI17: JP52.3 R70.2
RXI18: JP55.3 R74.2
RXI19: JP58.3 R78.2
RXI_PROTECTED: JP4.6 R2.1 U2.25
RXI_PROTECTED1: JP6.6 R6.1 U3.25
RXI_PROTECTED2: JP9.6 R10.1 U5.25
RXI_PROTECTED3: JP12.6 R14.1 U7.25
RXI_PROTECTED4: JP15.6 R18.1 U9.25
RXI_PROTECTED5: JP18.6 R22.1 U11.25
RXI_PROTECTED6: JP21.6 R26.1 U13.25
RXI_PROTECTED7: JP24.6 R30.1 U15.25
RXI_PROTECTED8: JP27.6 R34.1 U17.25
RXI_PROTECTED9: JP30.6 R38.1 U19.25
RXI_PROTECTED10: JP33.6 R42.1 U21.25
RXI_PROTECTED11: JP36.6 R46.1 U23.25
RXI_PROTECTED12: JP39.6 R50.1 U25.25
RXI_PROTECTED13: JP42.6 R54.1 U27.25
RXI_PROTECTED14: JP45.6 R58.1 U29.25
RXI_PROTECTED15: JP48.6 R62.1 U31.25
RXI_PROTECTED16: JP51.6 R66.1 U33.25
RXI_PROTECTED17: JP54.6 R70.1 U35.25
RXI_PROTECTED18: JP57.6 R74.1 U37.25
RXI_PROTECTED19: JP60.6 R78.1 U39.25
SI_STRIP: U2.1 U2.2 U2.4
SI_STRIP1: U3.1 U3.2 U3.4
SI_STRIP2: U5.1 U5.2 U5.4
SI_STRIP3: U7.1 U7.2 U7.4
SI_STRIP4: U9.1 U9.2 U9.4
SI_STRIP5: U11.1 U11.2 U11.4
SI_STRIP6: U13.1 U13.2 U13.4
SI_STRIP7: U15.1 U15.2 U15.4
SI_STRIP8: U17.1 U17.2 U17.4
SI_STRIP9: U19.1 U19.2 U19.4
SI_STRIP10: U21.1 U21.2 U21.4
SI_STRIP11: U23.1 U23.2 U23.4
SI_STRIP12: U25.1 U25.2 U25.4
SI_STRIP13: U27.1 U27.2 U27.4
SI_STRIP14: U29.1 U29.2 U29.4
SI_STRIP15: U31.1 U31.2 U31.4
SI_STRIP16: U33.1 U33.2 U33.4
SI_STRIP17: U35.1 U35.2 U35.4
SI_STRIP18: U37.1 U37.2 U37.4
SI_STRIP19: U39.1 U39.2 U39.4
TXO: JP2.2 JP4.7 U2.23
TXO1: JP1.2 JP6.7 U3.23
TXO2: JP7.2 JP9.7 U5.23
TXO3: JP10.2 JP12.7 U7.23
TXO4: JP13.2 JP15.7 U9.23
TXO5: JP16.2 JP18.7 U11.23
TXO6: JP19.2 JP21.7 U13.23
TXO7: JP22.2 JP24.7 U15.23
TXO8: JP25.2 JP27.7 U17.23
TXO9: JP28.2 JP30.7 U19.23
TXO10: JP31.2 JP33.7 U21.23
TXO11: JP34.2 JP36.7 U23.23
TXO12: JP37.2 JP39.7 U25.23
TXO13: JP40.2 JP42.7 U27.23
TXO14: JP43.2 JP45.7 U29.23
TXO15: JP46.2 JP48.7 U31.23
TXO16: JP49.2 JP51.7 U33.23
TXO17: JP52.2 JP54.7 U35.23
TXO18: JP55.2 JP57.7 U37.23
TXO19: JP58.2 JP60.7 U39.23
VIN: C3.1 JP2.4 U1.1 U1.3
VIN1: C7.1 JP1.4 U4.1 U4.3
VIN2: C11.1 JP7.4 U6.1 U6.3
VIN3: C15.1 JP10.4 U8.1 U8.3
VIN4: C19.1 JP13.4 U10.1 U10.3
VIN5: C23.1 JP16.4 U12.1 U12.3
VIN6: C27.1 JP19.4 U14.1 U14.3
VIN7: C31.1 JP22.4 U16.1 U16.3
VIN8: C35.1 JP25.4 U18.1 U18.3
VIN9: C39.1 JP28.4 U20.1 U20.3
VIN10: C43.1 JP31.4 U22.1 U22.3
VIN11: C47.1 JP34.4 U24.1 U24.3
VIN12: C51.1 JP37.4 U26.1 U26.3
VIN13: C55.1 JP40.4 U28.1 U28.3
VIN14: C59.1 JP43.4 U30.1 U30.3
VIN15: C63.1 JP46.4 U32.1 U32.3
VIN16: C67.1 JP49.4 U34.1 U34.3
VIN17: C71.1 JP52.4 U36.1 U36.3
VIN18: C75.1 JP55.4 U38.1 U38.3
VIN19: C79.1 JP58.4 U40.1 U40.3

## Tracks (layer width: path | path; a pad name or v marks a point on that pad's centre or on a via)
3.3V  (via drill 0.25)
  Top 0.152: R1.2 14.9,19.22 15.05,19.37 D1.C 14.1,19.81 13.84,20.07 13.84,23.24 13.97,23.37 14.99,23.37 | 18.04,61.77 C1.1
  Top 0.254: U2.7 19.05,61.77
  Top 0.406: U1.5 24.45,19.24 24.64,19.43 24.64,20.57 24.38,20.83 C2.1 22.95,21.76 22.86,21.84 18.16,21.84 17.4,22.61 15.37,22.61 14.99,22.99 14.99,23.37 14.99,39.75 15.37,40.13 16.26,40.13 16.51,40.39 16.51,48.64 v16.38,48.77 | v14.86,48.77 11.94,48.77 | 11.94,48.77 JP4.3 | 18.04,61.77 19.05,61.77 v19.05,61.21 | 11.94,48.77 11.94,52.7 12.32,53.09 14.22,53.09 14.48,53.34 14.48,60.96 v14.73,61.21
  Bottom 0.406: v16.38,48.77 v14.86,48.77 | v14.73,61.21 v19.05,61.21
3.3V1  (via drill 0.25)
  Top 0.152: R5.2 38.27,19.22 38.42,19.37 D3.C 37.47,19.81 37.21,20.07 37.21,23.24 37.34,23.37 38.35,23.37 | 41.41,61.77 C5.1
  Top 0.254: U3.7 42.42,61.77
  Top 0.406: U4.5 47.81,19.24 48.01,19.43 48.01,20.57 47.75,20.83 C6.1 46.32,21.76 46.23,21.84 41.53,21.84 40.77,22.61 38.73,22.61 38.35,22.99 38.35,23.37 38.35,39.75 38.73,40.13 39.62,40.13 39.88,40.39 39.88,48.64 v39.75,48.77 | v38.23,48.77 35.31,48.77 | 35.31,48.77 JP6.3 | 41.41,61.77 42.42,61.77 v42.42,61.21 | 35.31,48.77 35.31,52.7 35.69,53.09 37.59,53.09 37.85,53.34 37.85,60.96 v38.1,61.21
  Bottom 0.406: v39.75,48.77 v38.23,48.77 | v38.1,61.21 v42.42,61.21
3.3V2  (via drill 0.25)
  Top 0.152: R9.2 61.63,19.22 61.78,19.37 D5.C 60.83,19.81 60.58,20.07 60.58,23.24 60.71,23.37 61.72,23.37 | 64.78,61.77 C9.1